# Altium PCB display.PCBDOC
Units mil, origin at the board's own origin, x right, y up, seen from the top; angles counter-clockwise.
Board outline 6600 x 4300 mil, 6 copper layers (Top Layer, Internal Plane 1, Mid-Layer 1, Mid-Layer 2, Internal Plane 2, Bottom Layer); 58 components, 74 nets, 528 pads, 252 vias.
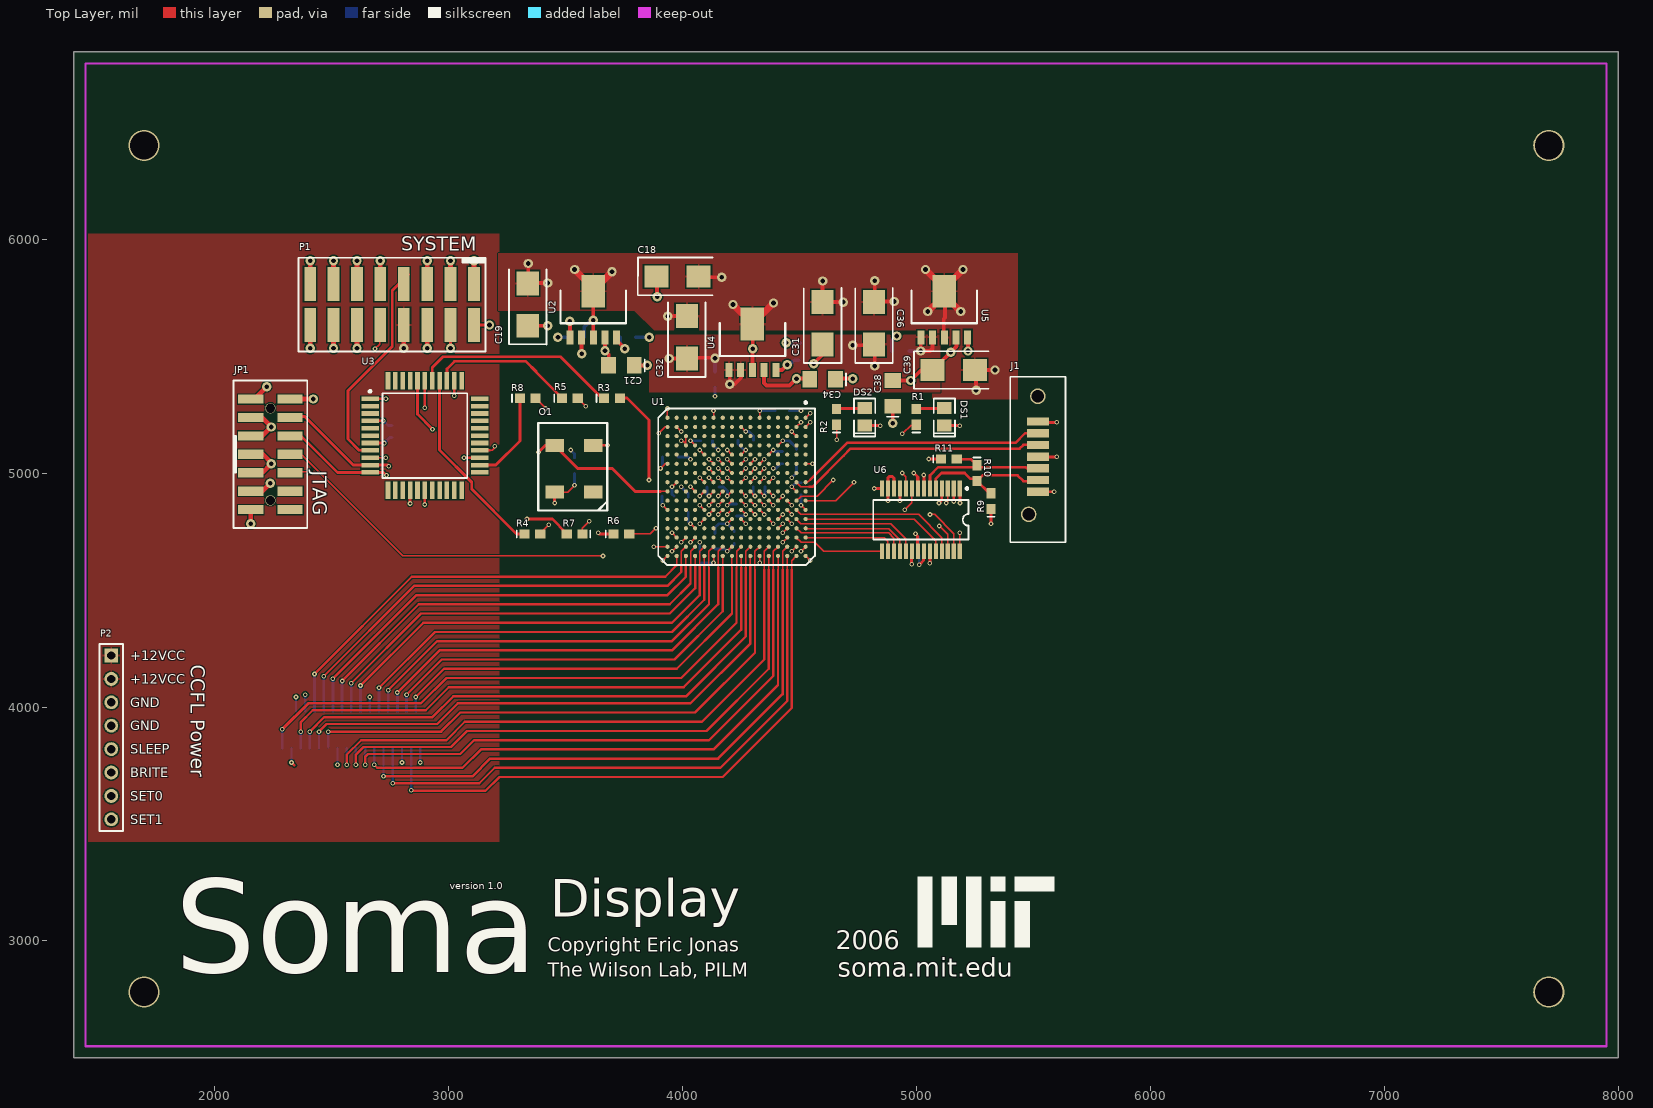
[diagram p0: Top Layer view]
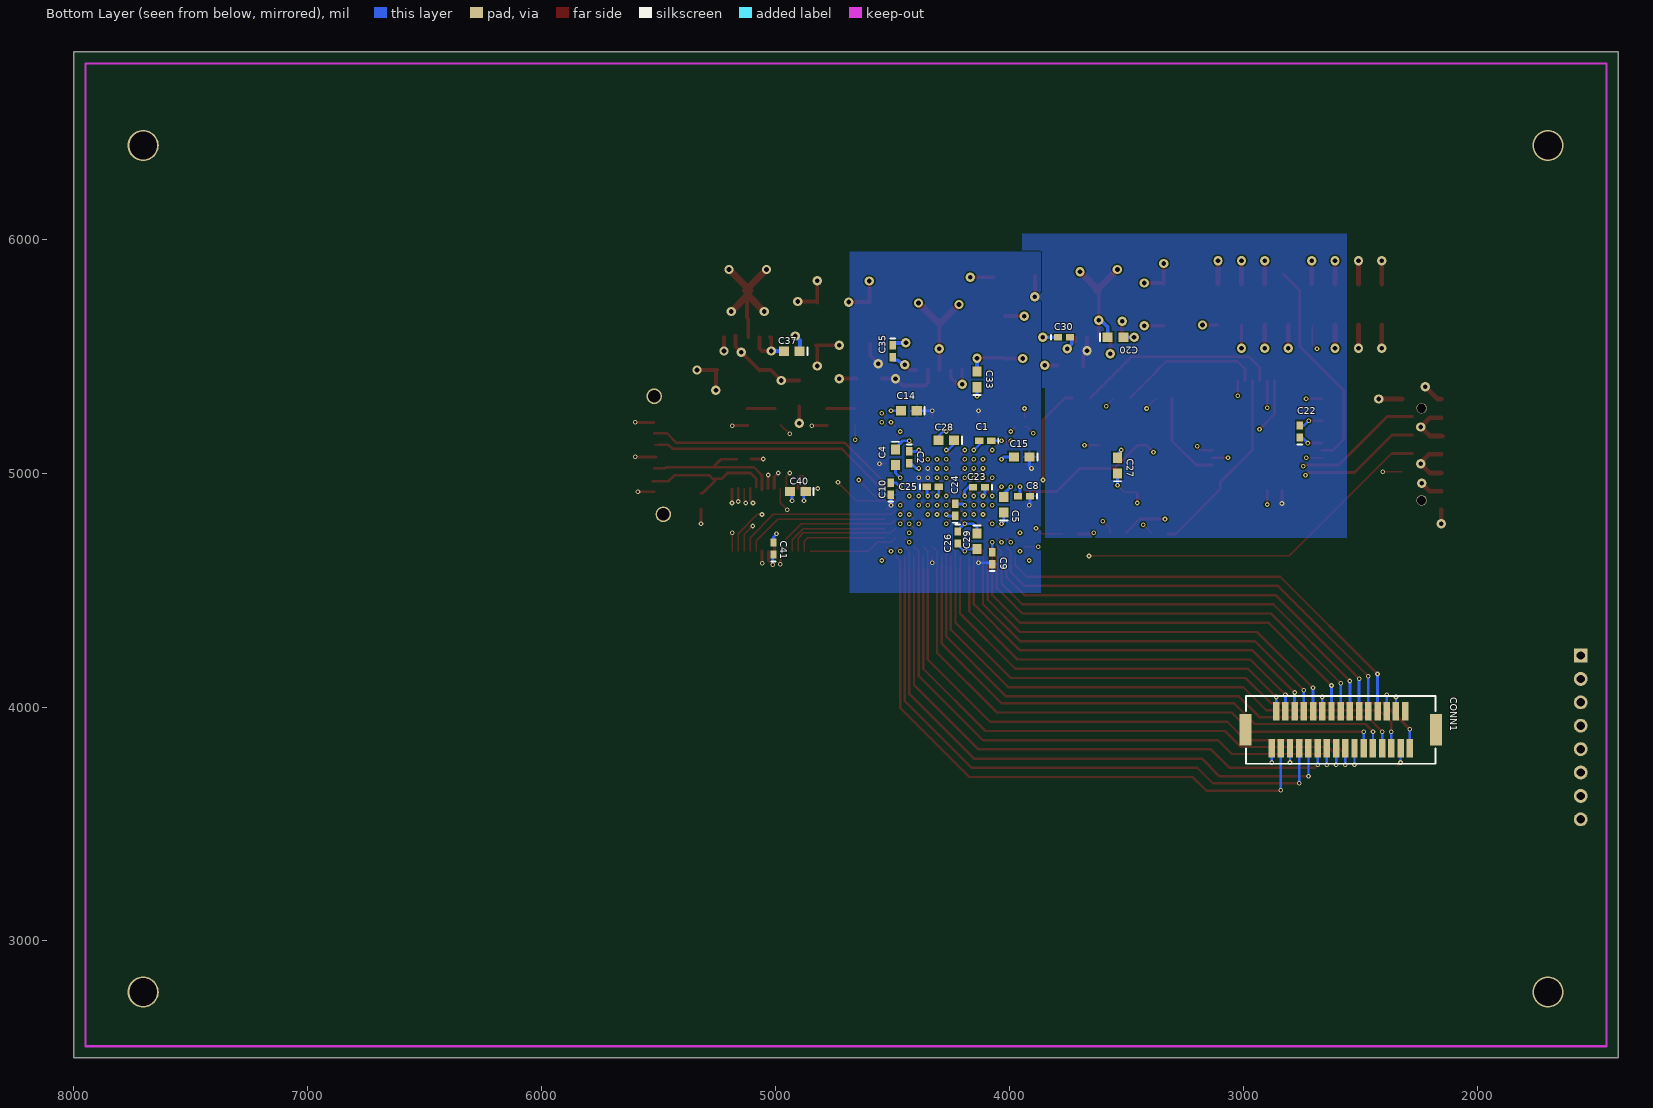
[diagram p1: Bottom Layer view, seen from below]
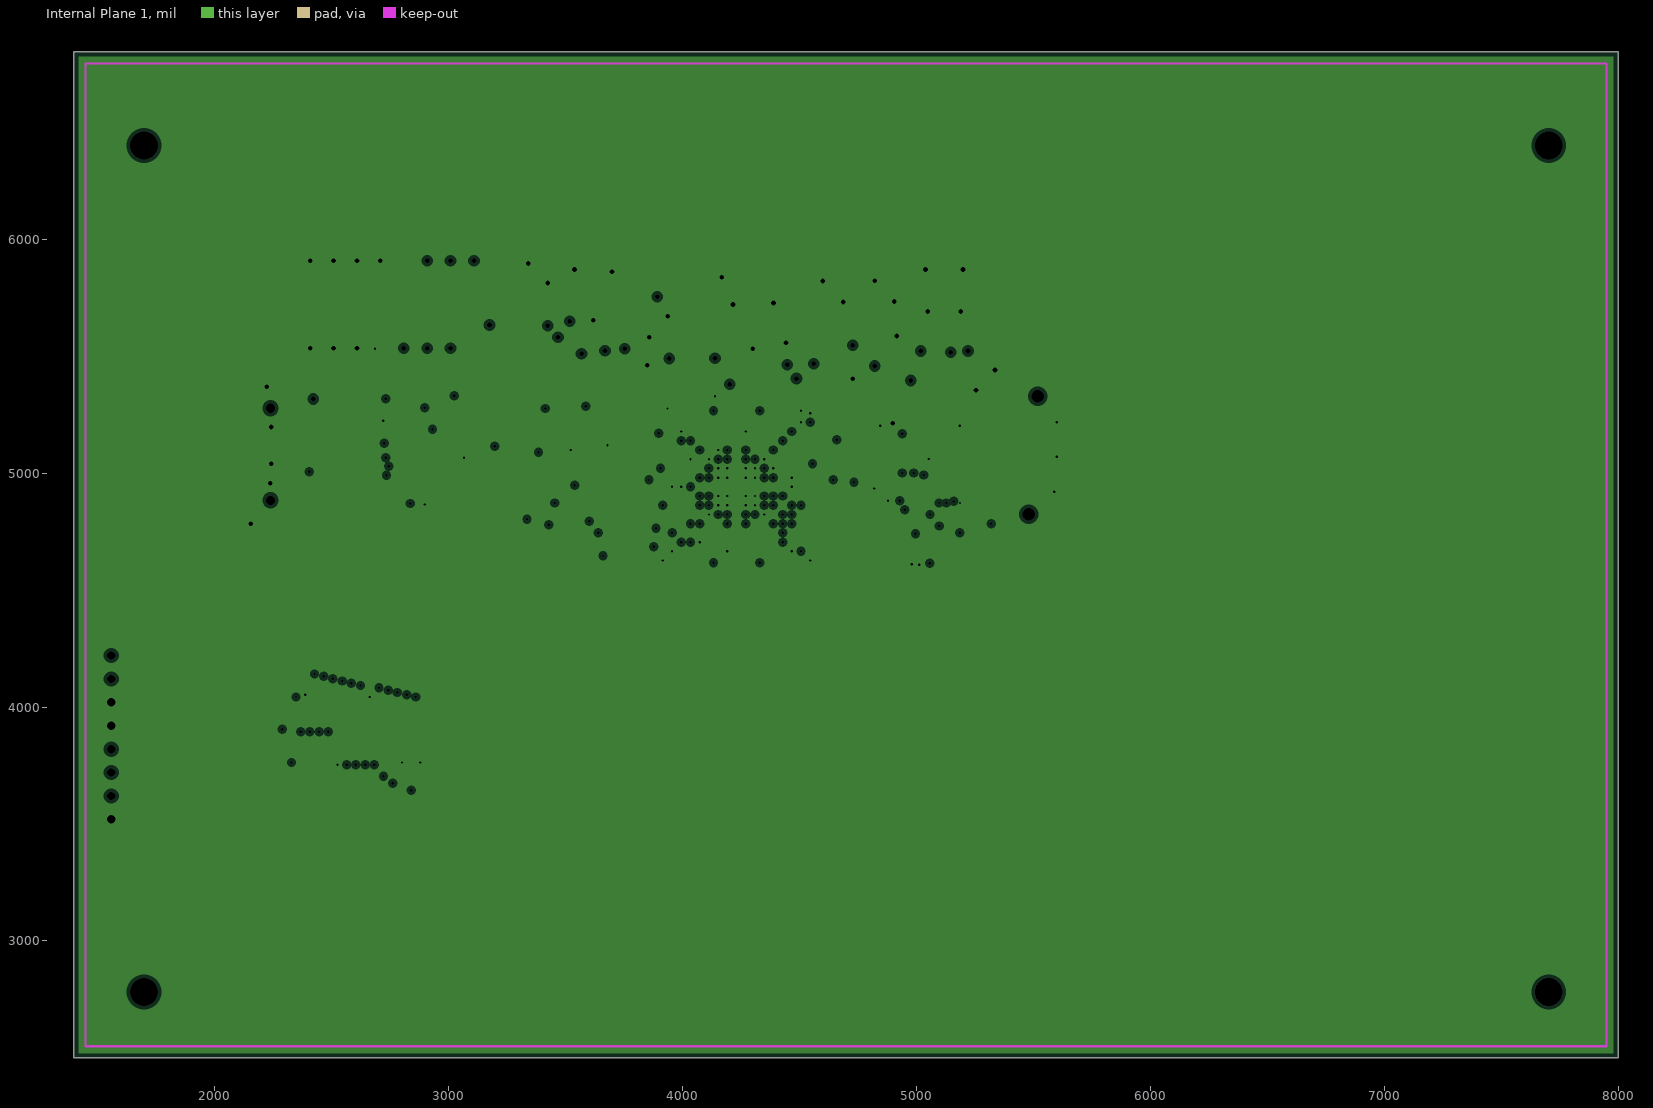
[diagram p2: Internal Plane 1, clearances drawn from the general rule]
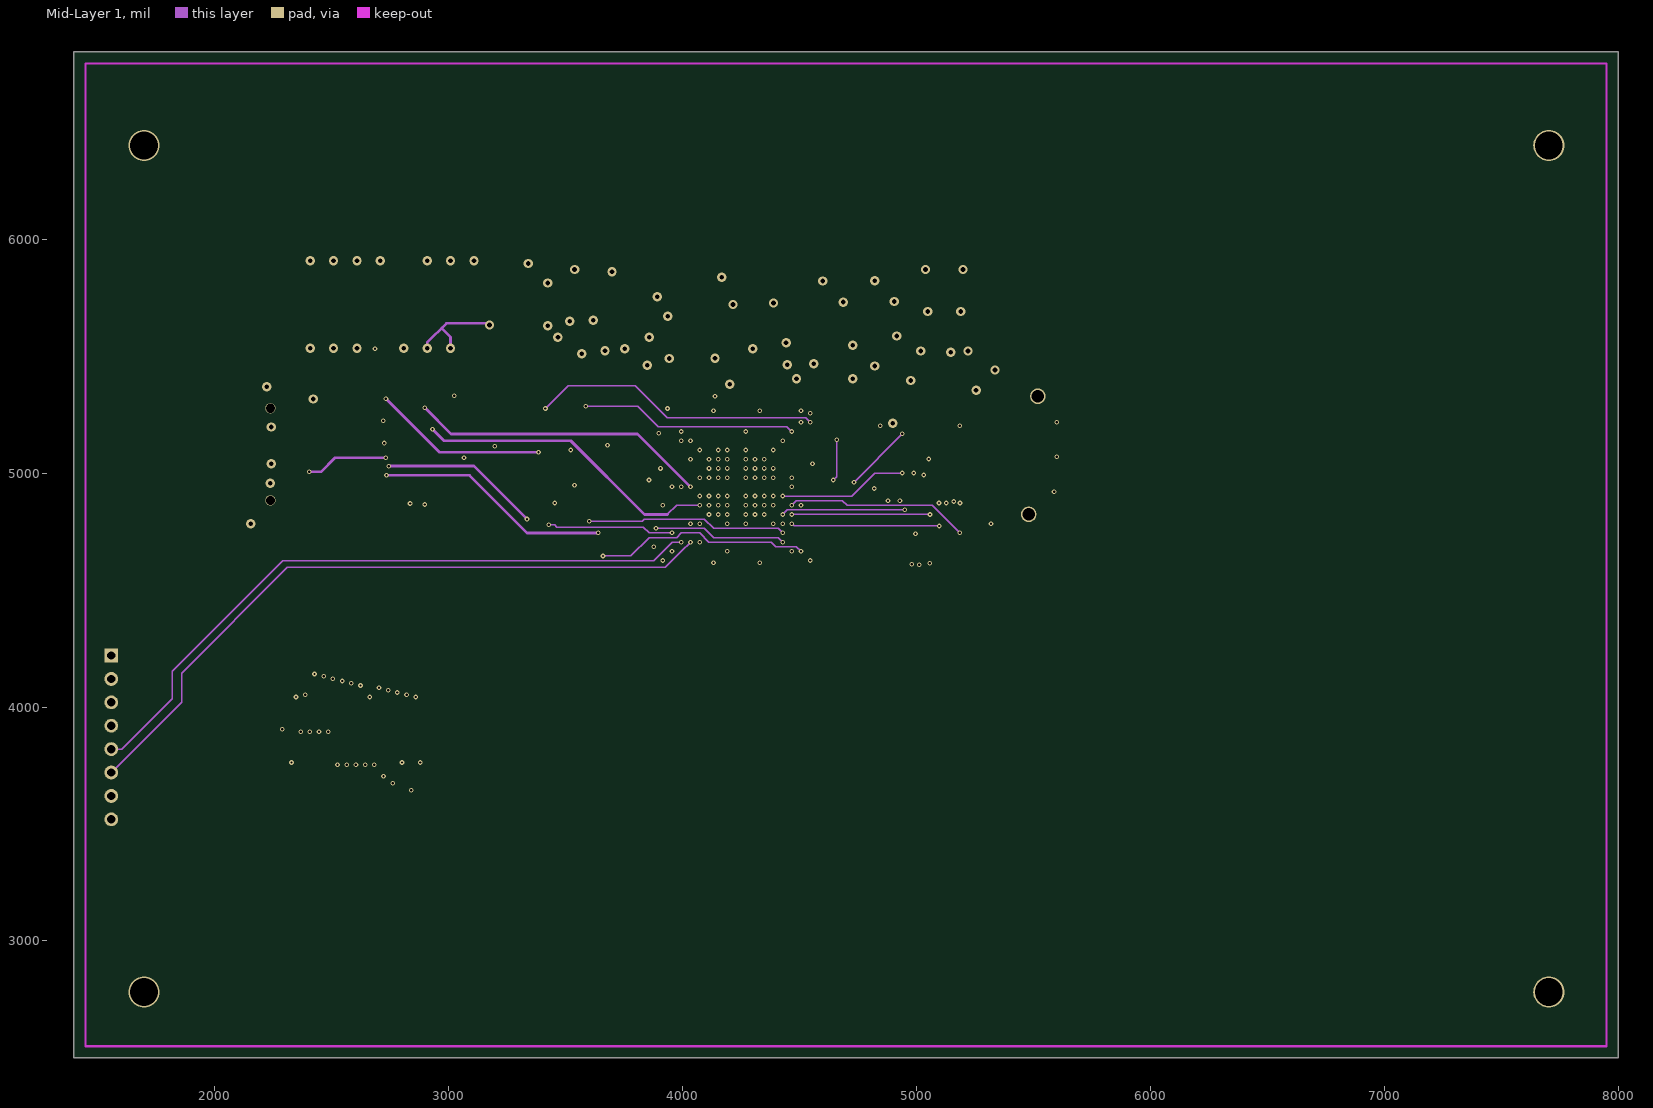
[diagram p3: Mid-Layer 1]
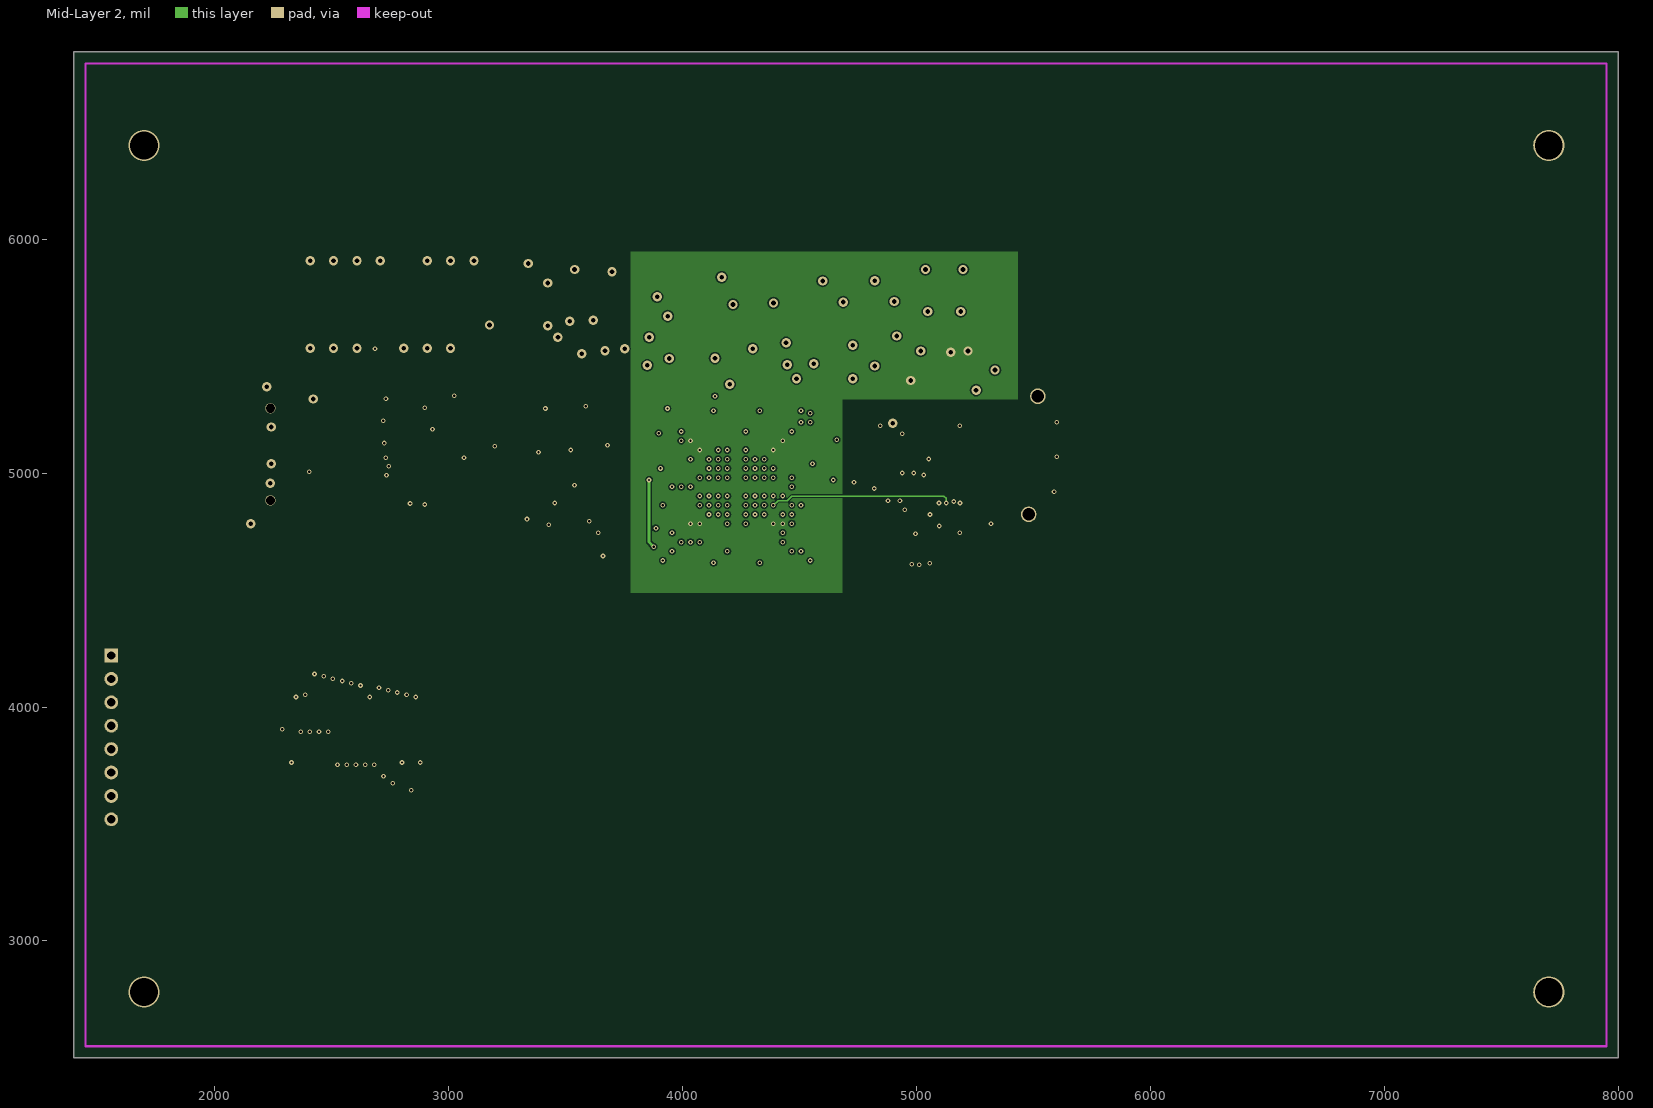
[diagram p4: Mid-Layer 2]
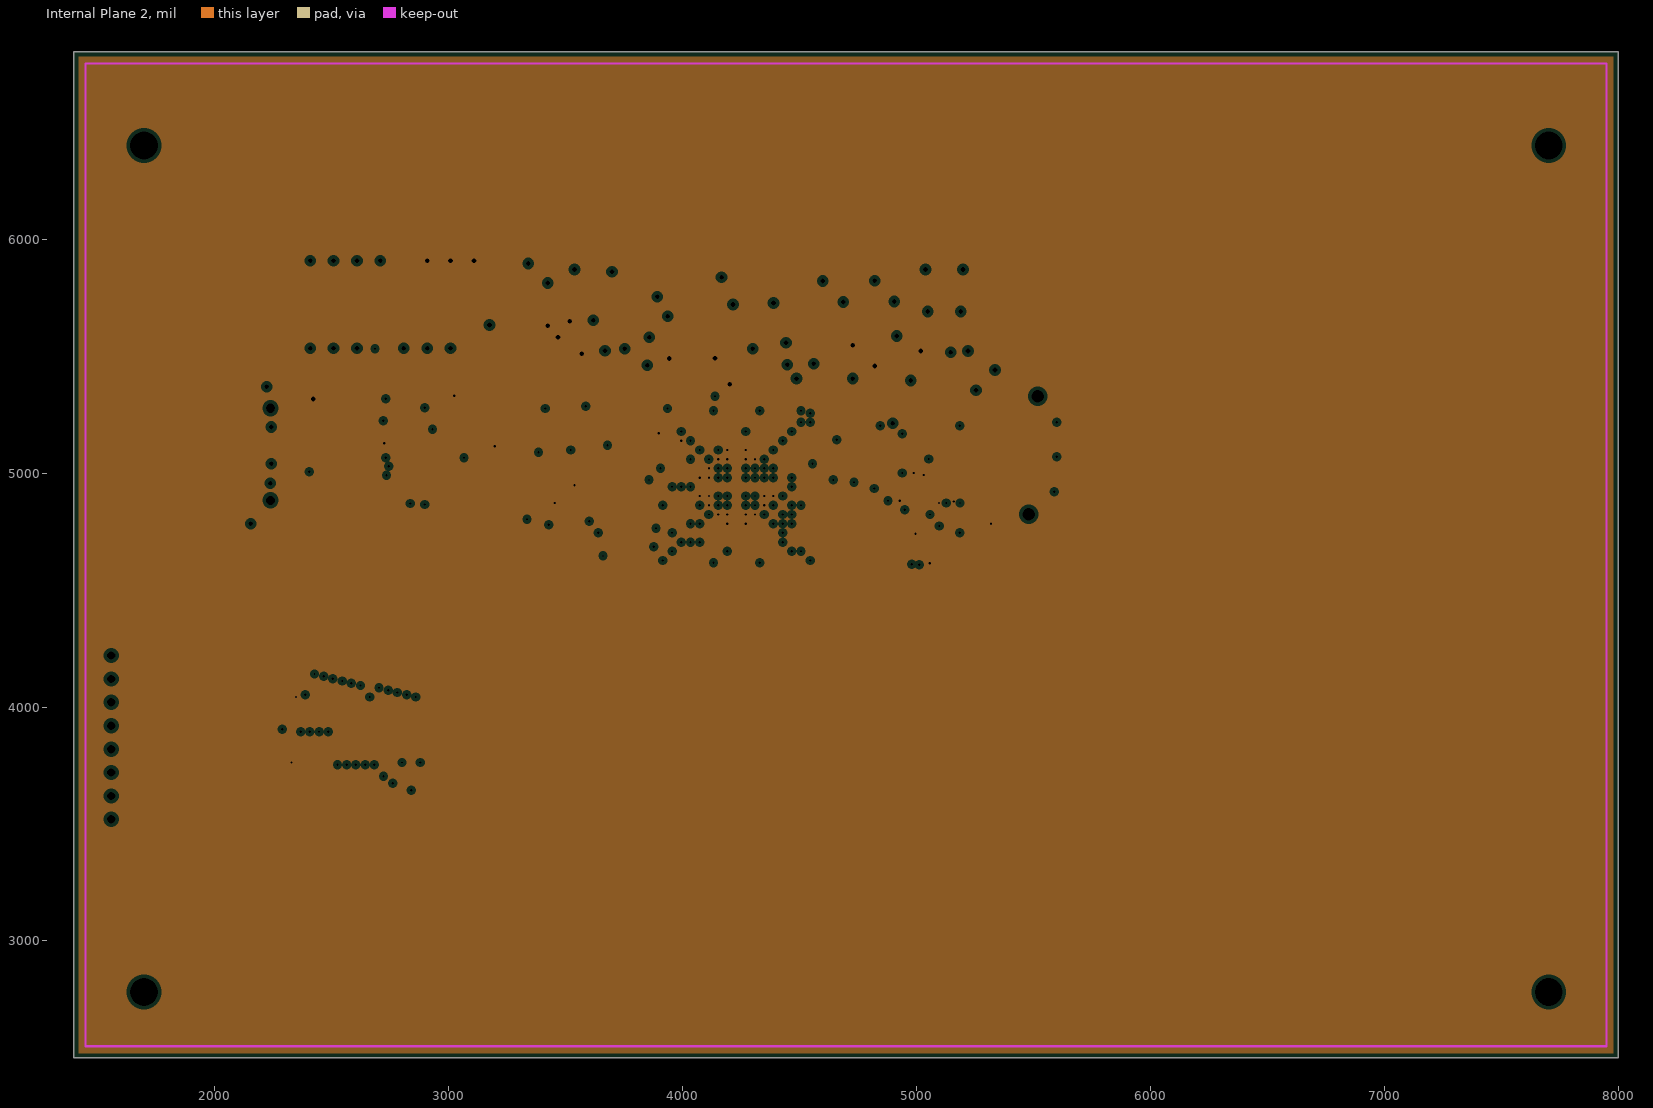
[diagram p5: Internal Plane 2, clearances drawn from the general rule]

## Layer stack, top to bottom
Top Layer: signal copper 1.4
Dielectric: core 12.6, FR-4, Dk 4.8
Internal Plane 1: plane copper 1.4, net GND
Dielectric: prepreg 12.6, FR-4, Dk 4.8
Mid-Layer 1: signal copper 1.4
Dielectric: core 12.6, FR-4, Dk 4.8
Mid-Layer 2: signal copper 1.4
Dielectric: prepreg 12.6, FR-4, Dk 4.8
Internal Plane 2: plane copper 1.4, net VCC
Dielectric: core 12.6, FR-4, Dk 4.8
Bottom Layer: signal copper 1.4

## Board outline
1400,2500 8000,2500 8000,6800 1400,6800

## Design rules (kind name [scope] priority, off if disabled: settings)
Clearance [All] p1: gap=6
ComponentClearance [All] p1: gap=10 collisioncheckmode=0 verticalgap=10
HoleSize [All] p1: absolutevalues=TRUE maxlimit=200 minlimit=1 maxpercent=80.000 minpercent=20.000
PlaneClearance [All] p1: clearance=15
PlaneConnect [All] p1: planeconnectstyle=Relief reliefexpansion=10 reliefentries=4 reliefconductorwidth=10 reliefairgap=7
PolygonConnect [All] p1: connectstyle=Relief reliefconductorwidth=10 reliefentries=4 polygonreliefangle="90 Angle"
RoomDefinition FPGA [InComponentClass('FPGA')] p1: confinementstyle=ConfineIn formatcopy=TRUE lockcomponents=FALSE outline 5999.06,3006.91 6314.03,3006.91 6314.03,3996.1 5999.06,3996.1
RoomDefinition SERIALIO [InComponentClass('SERIALIO')] p2: confinementstyle=ConfineIn formatcopy=TRUE lockcomponents=FALSE outline 6000,4015 7765,4015 7765,4850 6000,4850
RoomDefinition power [InComponentClass('power')] p3: confinementstyle=ConfineIn formatcopy=TRUE lockcomponents=FALSE outline 0,0 2000,0 2000,1000 0,1000
RoutingVias [All] p1: holewidth=20 width=20 viastyle="Through Hole" minholewidth=10 minwidth=20 maxholewidth=50 maxwidth=50
SolderMaskExpansion [All] p1: expansion=4
TestPointUsage [All] p1: valid=0 allowmultiple=FALSE
Testpoint [All] p1: side=15 testpointundercomponent=TRUE minsize=40 maxsize=100 preferedsize=60 minholesize=0 maxholesize=40 preferedholesize=32 testpointgrid=1 style=1023 order=0-112345678
Width [All] p1: maxlimit=50 minlimit=6 preferedwidth=8 toplayer_prefwidth=6 midlayer1_prefwidth=6 midlayer2_prefwidth=12 bottomlayer_prefwidth=12 minimp=50.000000 maximp=50.000000 favimp=50.000000
14 further rules are at their usual default settings.

## Classes and differential pairs
component class FPGA: CONN1 P2
component class SERIALIO: C40 C41 DS1 DS2 J1 R1 R2 R9 R10 R11 U6
component class power: C1 C2 C3 C4 C5 C6 C7 C8 C9 C10 C11 C12 C13 C14 C15 C16 C17 C18 C19 C20 C21 C22 C23 C24 C25 C26 C27 C28 C29 C30 C31 C32 C33 C34 C35 C36 C37 C38 C39 JP1 O1 P1 R3 R4 R5 R6 R7 R8 U1 U2 U3 U4 U5

## Components (designator, comment, footprint, x,y, rotation, side; value= is the part's Value field where it differs from the comment)
C1 "CAPACITOR" 0402 4104.33,5137.8 r0 bottom
C2 "CAPACITOR" 0402 4429.13,5066.99 r270 bottom
C4 "CAPACITOR" 0603 4488.19,5066.99 r270 bottom
C5 "CAPACITOR" 0603 4025.59,4864.11 r90 bottom
C8 "CAPACITOR" 0402 3938.91,4901.57 r0 bottom
C9 "CAPACITOR" 0402 4075,4636.05 r90 bottom
C10 "CAPACITOR" 0402 4507.87,4933.01 r90 bottom
C14 "CAPACITOR" 0603 4431.04,5265.75 r0 bottom
C15 "CAPACITOR" 0603 3948.76,5068.9 r0 bottom
C18 "POLCAP2" 6032 3980,5840 r0 top
C19 "POLCAP2" 6032 3340,5720 r90 top
C20 "CAPACITOR" 0603 3548.25,5580 r180 bottom
C21 "Cap" 1206 3740,5460 r180 top
C22 "CAPACITOR" 0402 2760,5177.34 r90 bottom
C23 "CAPACITOR" 0402 4131.75,4940 r0 bottom
C24 "CAPACITOR" 0402 4232.28,4842.52 r90 bottom
C25 "CAPACITOR" 0402 4328.8,4940.94 r180 bottom
C26 "CAPACITOR" 0402 4222.44,4724.41 r270 bottom
C27 "CAPACITOR" 0603 3540,5031.75 r90 bottom
C28 "CAPACITOR" 0603 4271.75,5140 r0 bottom
C29 "CAPACITOR" 0603 4140,4708.25 r270 bottom
C30 "CAPACITOR" 0402 3768.25,5580 r180 bottom
C31 "POLCAP2" 6032 4600,5640 r90 top
C32 "POLCAP2" 6032 4020,5580 r90 top
C33 "CAPACITOR" 0603 4140,5400 r90 bottom
C34 "Cap" 1206 4600,5400 r180 top
C35 "CAPACITOR" 0402 4500,5520 r270 bottom
C36 "POLCAP2" 6032 4820,5640 r90 top
C37 "CAPACITOR" 0603 4931.75,5520 r0 bottom
C38 "Cap" 1206 4900,5340 r90 top
C39 "POLCAP2" 6032 5160,5440 r0 top
C40 "CAPACITOR" 0603 4905.75,4921.5 r0 bottom
C41 "CAPACITOR" 0402 5009.84,4677.1 r90 bottom
CONN1 "31-pin connector" DF9A-31S-1V 2585.83,3902.76 r180 bottom locked
DS1 "LED3" "SMD _LED" 5120,5240 r90 top
DS2 "LED3" "SMD _LED" 4780,5240 r90 top
J1 "SATA 7-pin header" "MOLES 67800-5005" 5520,4920 r270 top
JP1 "Header 7X2" "SMT 2x7 2mm HDR" 2240,5080 r90 top
O1 "OSC2" ECS-3953M 3620.32,4918.43 r90 top
P1 "Header 8X2" "MOLEX 15-91-2160" 2760,5720 r0 top
P2 "LX9501" HDR1X8 1560,4220 r270 top
R1 "current-limiting series res" 0603 5000,5240 r90 top
R2 "current-limiting series res" 0603 4660,5240 r90 top
R3 "current-limiting series res" CC1608-0603 3700,5320 r0 top
R4 "current-limiting series res" CC1608-0603 3360,4740 r0 top
R5 "current-limiting series res" CC1608-0603 3520,5320 r0 top
R6 "current-limiting series res" CC1608-0603 3740,4740 r0 top
R7 "current-limiting series res" CC1608-0603 3540,4740 r180 top
R8 "current-limiting series res" CC1608-0603 3340,5320 r0 top
R9 "100" 0603 5320,4880 r90 top
R10 "100" 0603 5260,5000 r270 top
R11 "100" 0603 5140,5060 r0 top
U1 "Xilinx XC3S200-FT256" "Xilinx FT256 BGA" 4232.28,4940.94 r270 top locked
U2 "TPS79518" SOT223-5/Simple 3620,5580 r0 top
U3 "Xilinx CoolRunner-II XC2C64A" QFP10x10-G44/G10N 2900,5160 r0 top
U4 "TPS79525" SOT223-5/Simple 4300,5440 r0 top
U5 "TPS79501" SOT223-5/Simple 5120,5580 r0 top
U6 "DS92LV1224" SSO-G28/E4.3 5020,4800 r180 top

## Footprints (in the part's own frame and the unit in brackets; to place one, negate y for a bottom-side part, rotate by r counter-clockwise, add the part's x,y. Pads: shape width x height; smd on the part's side, far side on the other; paste and mask are expansions set on the pad)
0402 [mm] "Standard-sized 0402 Passive"
  rect 0.9x0.7 smd: 1(-0.65,0) 2(0.65,0)
  silkscreen extent -1.4,-0.25 -1.4,0.25
0603 [mm] "Standard-sized 0603 Passive"
  rect 1.1x1 smd: 1(-0.85,0) 2(0.85,0)
  silkscreen extent -1.7,-0.4 -1.7,0.4
1206 [mm] "Standard-sized 1206 Passive"
  rect 1.6x1.8 smd: 1(-1.4,0) 2(1.4,0)
  silkscreen extent -2.53,-0.65 -2.53,0.65
6032 [mm] "Standard-Sized 7343 Polarized Leadless Cap"
  rect 2.6x2.4 smd: 1(-2.3,0) 2(2.3,0)
  silkscreen extent -4.32,-2.03 3.81,2.05
CC1608-0603 [mm] "Chip Capacitor; Body 1.6 x 0.8 mm (LxW typ)"
  rect 1.1x1 smd: 1(-0.85,0) 2(0.85,0)
  silkscreen extent -1.7,-0.4 -1.7,0.4
DF9A-31S-1V [mm] "Hirose 31-pin receptacle"
  rect 1.3x3.4 smd: 0(-10.35,0) 0(10.35,0)
  rect 0.7x2 smd: 1(-7.5,-2) 2(-7,2) 3(-6.5,-2) 4(-6,2) 5(-5.5,-2) 6(-5,2) 7(-4.5,-2) 8(-4,2) 9(-3.5,-2) 10(-3,2) 11(-2.5,-2) 12(-2,2) 13(-1.5,-2) 14(-1,2) 15(-0.5,-2) 16(0,2) 17(0.5,-2) 18(1,2) 19(1.5,-2) 20(2,2) 21(2.5,-2) 22(3,2) 23(3.5,-2) 24(4,2) 25(4.5,-2) 26(5,2) 27(5.5,-2) 28(6,2) 29(6.5,-2) 30(7,2) 31(7.5,-2)
  silkscreen extent -10.29,-3.68 10.29,3.68
ECS-3953M [mm] "ECS SMD CLOCK OSCILLATOR"
  rect 1.4x2 smd: 1(0,0) 2(5.08,0) 3(5.08,4.2) 4(0,4.2)
  silkscreen extent -2,-1.5 7.5,6
HDR1X8 [mm] "Connector; Header; 8 Position"
  rect 1.5x1.5 hole 0.9: 1(0,0)
  round 1.5 hole 0.9: 2(2.54,0) 3(5.08,0) 4(7.62,0) 5(10.16,0) 6(12.7,0) 7(15.24,0) 8(17.78,0)
  silkscreen extent -1.27,-1.27 19.05,1.27
"MOLES 67800-5005" [mm] "SATA vertical PCB HEADER SMT"
  round 1.7 hole 1.35: 0(-10.37,0) 0(2.46,-1)
  rect 0.9x2.4 smd: 1(0,0) 2(-1.27,0) 3(-2.54,0) 4(-3.81,0) 5(-5.08,0) 6(-6.35,0) 7(-7.62,0)
  silkscreen extent -12.5,-3 5.5,3
"MOLEX 15-91-2160" [mm] "SMT 100-mil pitch 16 -pin dual-row header"
  rect 1.27x3.68 smd: 1(8.89,2.22) 2(8.89,-2.22) 3(6.35,2.22) 4(6.35,-2.22) 5(3.81,2.22) 6(3.81,-2.22) 7(1.27,2.22) 8(1.27,-2.22) 9(-1.27,2.22) 10(-1.27,-2.22) 11(-3.81,2.22) 12(-3.81,-2.22) 13(-6.35,2.22) 14(-6.35,-2.22) 15(-8.89,2.22) 16(-8.89,-2.22)
  silkscreen extent -10.16,-5.08 10.16,5.08
QFP10x10-G44/G10N [mm] "QFP; 44 Leads; Body 10 x 10 mm; Pitch 0.8 mm"
  rect 1.9x0.5 smd: 1(-5.95,4) 2(-5.95,3.2) 3(-5.95,2.4) 4(-5.95,1.6) 5(-5.95,0.8) 6(-5.95,0) 7(-5.95,-0.8) 8(-5.95,-1.6) 9(-5.95,-2.4) 10(-5.95,-3.2) 11(-5.95,-4) 23(5.95,-4) 24(5.95,-3.2) 25(5.95,-2.4) 26(5.95,-1.6) 27(5.95,-0.8) 28(5.95,0) 29(5.95,0.8) 30(5.95,1.6) 31(5.95,2.4) 32(5.95,3.2) 33(5.95,4)
  rect 0.5x1.9 smd: 12(-4,-5.95) 13(-3.2,-5.95) 14(-2.4,-5.95) 15(-1.6,-5.95) 16(-0.8,-5.95) 17(0,-5.95) 18(0.8,-5.95) 19(1.6,-5.95) 20(2.4,-5.95) 21(3.2,-5.95) 22(4,-5.95) 34(4,5.95) 35(3.2,5.95) 36(2.4,5.95) 37(1.6,5.95) 38(0.8,5.95) 39(0,5.95) 40(-0.8,5.95) 41(-1.6,5.95) 42(-2.4,5.95) 43(-3.2,5.95) 44(-4,5.95)
  silkscreen extent -6.07,-4.6 4.6,4.92
"SMD _LED" [mm] "SMT LED; 2 Leads"
  rect 1.3x1.6 smd: 1(0.95,0) 2(-0.95,0)
  silkscreen extent -2.13,-1.15 2,1.15
"SMT 2x7 2mm HDR" [mm] "SMT dual-row 14-pin SMT header with posts, like Molex 87832-1420"
  round 1.1 hole 1: 0(-5,0) 0(5,0)
  rect 1x2.75 smd: 1(6,2.125) 2(6,-2.125) 3(4,2.125) 4(4,-2.125) 5(2,2.125) 6(2,-2.125) 7(0,2.125) 8(0,-2.125) 9(-2,2.125) 10(-2,-2.125) 11(-4,2.125) 12(-4,-2.125) 13(-6,2.125) 14(-6,-2.125)
  silkscreen extent -8,-4 8,4
SOT223-5/Simple [mil] "SOT-223 without large heatsink"
  rect 30x60 smd: 1(-100,0) 2(-50,0) 3(0,0) 4(50,0) 5(100,0)
  rect 100x140 smd: 3(0,196.85)
  silkscreen extent -140,60 140,200
SSO-G28/E4.3 [mm] "SSOP; 28 Leads; Body Width 5.3 mm; Pitch 0.65 mm"
  rect 0.45x1.7 smd: 1(-4.225,-3.4) 2(-3.575,-3.4) 3(-2.925,-3.4) 4(-2.275,-3.4) 5(-1.625,-3.4) 6(-0.975,-3.4) 7(-0.325,-3.4) 8(0.325,-3.4) 9(0.975,-3.4) 10(1.625,-3.4) 11(2.275,-3.4) 12(2.925,-3.4) 13(3.575,-3.4) 14(4.225,-3.4) 15(4.225,3.4) 16(3.575,3.4) 17(2.925,3.4) 18(2.275,3.4) 19(1.625,3.4) 20(0.975,3.4) 21(0.325,3.4) 22(-0.325,3.4) 23(-0.975,3.4) 24(-1.625,3.4) 25(-2.275,3.4) 26(-2.925,3.4) 27(-3.575,3.4) 28(-4.225,3.4)
  silkscreen extent -5.18,-3.52 5.18,2.15
"Xilinx FT256 BGA" [mm] "Xilinx BGA"
  round 0.45 smd mask+0.05: A1(-7.5,7.5) A2(-6.5,7.5) A3(-5.5,7.5) A4(-4.5,7.5) A5(-3.5,7.5) A6(-2.5,7.5) A7(-1.5,7.5) A8(-0.5,7.5) A9(0.5,7.5) A10(1.5,7.5) A11(2.5,7.5) A12(3.5,7.5) A13(4.5,7.5) A14(5.5,7.5) A15(6.5,7.5) A16(7.5,7.5) B1(-7.5,6.5) B2(-6.5,6.5) B3(-5.5,6.5) B4(-4.5,6.5) B5(-3.5,6.5) B6(-2.5,6.5) B7(-1.5,6.5) B8(-0.5,6.5) B9(0.5,6.5) B10(1.5,6.5) B11(2.5,6.5) B12(3.5,6.5) B13(4.5,6.5) B14(5.5,6.5) B15(6.5,6.5) B16(7.5,6.5) C1(-7.5,5.5) C2(-6.5,5.5) C3(-5.5,5.5) C4(-4.5,5.5) C5(-3.5,5.5) C6(-2.5,5.5) C7(-1.5,5.5) C8(-0.5,5.5) C9(0.5,5.5) C10(1.5,5.5) C11(2.5,5.5) C12(3.5,5.5) C13(4.5,5.5) C14(5.5,5.5) C15(6.5,5.5) C16(7.5,5.5) D1(-7.5,4.5) D2(-6.5,4.5) D3(-5.5,4.5) D4(-4.5,4.5) D5(-3.5,4.5) D6(-2.5,4.5) D7(-1.5,4.5) D8(-0.5,4.5) D9(0.5,4.5) D10(1.5,4.5) D11(2.5,4.5) D12(3.5,4.5) D13(4.5,4.5) D14(5.5,4.5) D15(6.5,4.5) D16(7.5,4.5) E1(-7.5,3.5) E2(-6.5,3.5) E3(-5.5,3.5) E4(-4.5,3.5) E5(-3.5,3.5) E6(-2.5,3.5) E7(-1.5,3.5) E8(-0.5,3.5) E9(0.5,3.5) E10(1.5,3.5) E11(2.5,3.5) E12(3.5,3.5) E13(4.5,3.5) E14(5.5,3.5) E15(6.5,3.5) E16(7.5,3.5) F1(-7.5,2.5) F2(-6.5,2.5) F3(-5.5,2.5) F4(-4.5,2.5) F5(-3.5,2.5) F6(-2.5,2.5) F7(-1.5,2.5) F8(-0.5,2.5) F9(0.5,2.5) F10(1.5,2.5) F11(2.5,2.5) F12(3.5,2.5) F13(4.5,2.5) F14(5.5,2.5) F15(6.5,2.5) F16(7.5,2.5) G1(-7.5,1.5) G2(-6.5,1.5) G3(-5.5,1.5) G4(-4.5,1.5) G5(-3.5,1.5) G6(-2.5,1.5) G7(-1.5,1.5) G8(-0.5,1.5) G9(0.5,1.5) G10(1.5,1.5) G11(2.5,1.5) G12(3.5,1.5) G13(4.5,1.5) G14(5.5,1.5) G15(6.5,1.5) G16(7.5,1.5) H1(-7.5,0.5) H2(-6.5,0.5) H3(-5.5,0.5) H4(-4.5,0.5) H5(-3.5,0.5) H6(-2.5,0.5) H7(-1.5,0.5) H8(-0.5,0.5) H9(0.5,0.5) H10(1.5,0.5) H11(2.5,0.5) H12(3.5,0.5) H13(4.5,0.5) H14(5.5,0.5) H15(6.5,0.5) H16(7.5,0.5) J1(-7.5,-0.5) J2(-6.5,-0.5) J3(-5.5,-0.5) J4(-4.5,-0.5) J5(-3.5,-0.5) J6(-2.5,-0.5) J7(-1.5,-0.5) J8(-0.5,-0.5) J9(0.5,-0.5) J10(1.5,-0.5) J11(2.5,-0.5) J12(3.5,-0.5) J13(4.5,-0.5) J14(5.5,-0.5) J15(6.5,-0.5) J16(7.5,-0.5) K1(-7.5,-1.5) K2(-6.5,-1.5) K3(-5.5,-1.5) K4(-4.5,-1.5) K5(-3.5,-1.5) K6(-2.5,-1.5) K7(-1.5,-1.5) K8(-0.5,-1.5) K9(0.5,-1.5) K10(1.5,-1.5) K11(2.5,-1.5) K12(3.5,-1.5) K13(4.5,-1.5) K14(5.5,-1.5) K15(6.5,-1.5) K16(7.5,-1.5) L1(-7.5,-2.5) L2(-6.5,-2.5) L3(-5.5,-2.5) L4(-4.5,-2.5) L5(-3.5,-2.5) L6(-2.5,-2.5) L7(-1.5,-2.5) L8(-0.5,-2.5) L9(0.5,-2.5) L10(1.5,-2.5) L11(2.5,-2.5) L12(3.5,-2.5) L13(4.5,-2.5) L14(5.5,-2.5) L15(6.5,-2.5) L16(7.5,-2.5) M1(-7.5,-3.5) M2(-6.5,-3.5) M3(-5.5,-3.5) M4(-4.5,-3.5) M5(-3.5,-3.5) M6(-2.5,-3.5) M7(-1.5,-3.5) M8(-0.5,-3.5) M9(0.5,-3.5) M10(1.5,-3.5) M11(2.5,-3.5) M12(3.5,-3.5) M13(4.5,-3.5) M14(5.5,-3.5) M15(6.5,-3.5) M16(7.5,-3.5) N1(-7.5,-4.5) N2(-6.5,-4.5) N3(-5.5,-4.5) N4(-4.5,-4.5) N5(-3.5,-4.5) N6(-2.5,-4.5) N7(-1.5,-4.5) N8(-0.5,-4.5) N9(0.5,-4.5) N10(1.5,-4.5) N11(2.5,-4.5) N12(3.5,-4.5) N13(4.5,-4.5) N14(5.5,-4.5) N15(6.5,-4.5) N16(7.5,-4.5) P1(-7.5,-5.5) P2(-6.5,-5.5) P3(-5.5,-5.5) P4(-4.5,-5.5) P5(-3.5,-5.5) P6(-2.5,-5.5) P7(-1.5,-5.5) P8(-0.5,-5.5) P9(0.5,-5.5) P10(1.5,-5.5) P11(2.5,-5.5) P12(3.5,-5.5) P13(4.5,-5.5) P14(5.5,-5.5) P15(6.5,-5.5) P16(7.5,-5.5) R1(-7.5,-6.5) R2(-6.5,-6.5) R3(-5.5,-6.5) R4(-4.5,-6.5) R5(-3.5,-6.5) R6(-2.5,-6.5) R7(-1.5,-6.5) R8(-0.5,-6.5) R9(0.5,-6.5) R10(1.5,-6.5) R11(2.5,-6.5) R12(3.5,-6.5) R13(4.5,-6.5) R14(5.5,-6.5) R15(6.5,-6.5) R16(7.5,-6.5) T1(-7.5,-7.5) T2(-6.5,-7.5) T3(-5.5,-7.5) T4(-4.5,-7.5) T5(-3.5,-7.5) T6(-2.5,-7.5) T7(-1.5,-7.5) T8(-0.5,-7.5) T9(0.5,-7.5) T10(1.5,-7.5) T11(2.5,-7.5) T12(3.5,-7.5) T13(4.5,-7.5) T14(5.5,-7.5) T15(6.5,-7.5) T16(7.5,-7.5)
  silkscreen extent -9.27,-8.5 8.5,8.5

## Part data
C1 C2 C4 C5 C8 C9 C10 C14 C15 C18 C19 C22 C23 C24 C25 C26 C27 C28 C29 C31 C32 C36 C39 C40 C41: "Standard Capacitor"
C20 C30 C33 C35 C37: library part Cap, "Capacitor"
C21 C34 C38: "Capacitor"
CONN1: library part CON31
DS1 DS2: "Typical BLUE SiC LED"
J1: library part SATA-7
JP1: "Header, 7-Pin, Dual row"
O1: "ECS SMD Oscillator, ECS-3953M"
P1: "Header, 8-Pin, Dual row"
P2: library part "Header 8", "Header, 8-Pin"
R1 R2 R3 R4 R5 R6 R7 R8: library part Res1, "Resistor"
R9 R10 R11: library part RESISTOR, "Standard Passive Resistor"
U1: library part XC3S200-FT256, "Xilinx Spartan-3 FPGA"
U2 U4 U5: library part TPS795XX, "TI Ultra-low-noise LDO"
U3: library part XC2C64A-5VQ44C
U6: "30-66 MHz 10-Bit Bus LVDS Deserializer"

## Free pads (board coordinates)
  round 133.86 hole 118.11: 0(1700,2781.89) 0(1700,6400) 0(7703.94,2781.89) 0(7703.94,6400)

## Via types
v1: diameter 20, hole 10, Top Layer to Bottom Layer, tented top, 100 vias
v2: diameter 20, hole 10, Top Layer to Bottom Layer, 87 vias
v3: diameter 40, hole 20, Top Layer to Bottom Layer, 65 vias

## Nets (pads, with @x,y where several pads share a name; then routed paths per layer and width w, separated by ;. In a path a pad name is that pad's centre, name@x,y a point inside that pad or via, vN(x,y) a via of type N, cw(c..) or ccw(c..) an arc to the next point about the centre after c; other vN are vias at no path point)
+1.2VCC: C1.1 C2.1 C4.1 C5.1 C38.2 C39.1 U1.D4 U1.D13 U1.E5 U1.E12 U1.M5 U1.M12 U1.N4 U1.N13 U5.4 U5.5 | length 874.9
  Top Layer w6: v1(4035.43,4783.46) U1.N13 ; v1(4035.43,5137.8) U1.N4 ; v1(4074.8,4783.46) U1.M12 ; v1(4074.8,5098.43) U1.M5 ; U1.E12 v1(4389.76,4783.46) ; U1.E5 v1(4389.76,5098.43) ; U1.D13 v1(4429.13,4783.46) ; U1.D4 v1(4429.13,5137.8)
  Top Layer w16: C38.2 v3(4976.81,5395.12) 5021.69,5440 C39.1 ; C39.1@5068.9,5437.99 5172.24,5541.34 U5.4@5172.24,5585.63 ; v3(5221.46,5521.65) U5.5@5221.46,5580.71
  Bottom Layer w12: C5.1 4025.59,4793.31 v1(4035.43,4783.46) ; v1(4035.43,5137.8) C1.1 ; v1(4389.76,5098.43) 4395.61,5092.58 C2.1 ; v1(4429.13,5137.8) 4457.35,5137.8 4488.19,5106.96 C4.1
  other v3: 5147.64,5516.73
+1.8VCC: C18.1 C21.2 U2.4 U3.15 | length 278.5
  Top Layer w12: v2(2837.01,4869.68) U3.15
  Top Layer w16: U2.4 v3(3670,5522.91) 3686.02,5506.89 C21.2@3686.02,5452.76 ; v3(3892.72,5752.95) C18.1@3892.72,5841.54
+2.5VCC: C8.1 C9.1 C10.1 C14.1 C15.1 C31.1 C34.2 U1.A6 U1.A11 U1.E8 U1.F1 U1.F7 U1.F8 U1.F16 U1.L1 U1.L16 U1.T6 U1.T11 U4.4 | length 945
  Top Layer w6: v1(3907.48,5019.69) 3927.17,5039.37 U1.T6 ; v1(3917.32,4862.2) U1.T11 ; v1(4133.86,4616.14) U1.L16 ; U1.L1 v1(4133.86,5265.75) ; v1(4330.71,4616.14) U1.F16 ; U1.F8 v1(4350.39,4980.31) ; U1.F7 v1(4350.39,5019.69) ; U1.F1 v1(4330.71,5265.75) ; U1.E8 v1(4389.76,4980.31) ; v1(4507.87,4862.2) U1.A11 ; U1.A6 v1(4557.09,5039.37)
  Top Layer w16: U4.4 4350,5384.25 4360.24,5374.02 4458.66,5374.02 v3(4488.19,5403.54) C34.2@4547.24,5403.54 ; v3(4562.01,5467.52) 4596.46,5501.97 C31.1@4596.46,5551.18
  Bottom Layer w12: v1@3913.32,4866.2 C8.1 ; 3915.29,5027.5 C15.1 ; C9.1@4080.68,4616.14 v1(4133.86,4616.14) 4122.83,4616.14 ; v1(4330.71,5265.75) C14.1 ; v1(4507.87,4862.2) C10.1
+5VCC: P1.2 P1.4 P1.6 | length 695.1
  Top Layer w12: v3(3010,5533.31) P1.4 ; P1.2 v3(3176.46,5632.6)
  Top Layer w20: v3(2910,5533.07) P1.6
  Mid-Layer 1 w12: v3(2910,5533.07) 2910,5557.64 2992.13,5639.76 v3@3179.13,5639.76 ; 2971.98,5619.61 3010,5581.59 v3(3010,5533.31)
+12VCC: P1.8 P2.1 P2.2 | length 99.5
  Top Layer w20: v3(2810,5533.07) P1.8
B0: CONN1.20 U1.P16 | length 1917.5
  Top Layer w6: 4015.75,4606.3 U1.P16
  Top Layer w10: v2(2507.09,4121.26) 2864.17,4478.35 3937.01,4478.35 4015.75,4557.09 4015.75,4606.3
  Bottom Layer w12: CONN1.20 v2(2507.09,4121.26)
B1: CONN1.21 U1.F15 | length 2495.2
  Top Layer w6: 4311.02,4586.61 4311.02,4665.35 U1.F15
  Top Layer w10: v2(2487.4,3894.89) 2969.69,3894.89 3051.18,3976.38 4055.12,3976.38 4311.02,4232.28 4311.02,4586.61
  Bottom Layer w6: CONN1.21 CONN1.21@2487.4,3828.74
  Bottom Layer w10: CONN1.21@2487.4,3828.74 v2(2487.4,3894.89)
B2: CONN1.22 U1.P15 | length 1979
  Top Layer w6: 3996.06,4606.3 3996.06,4665.35 U1.P15
  Top Layer w10: v2(2467.72,4131.11) 2854.33,4517.72 3937.01,4517.72 3996.06,4576.77 3996.06,4606.3
  Bottom Layer w12: CONN1.22 v2(2467.72,4131.11)
B3: CONN1.23 U1.G16 | length 2444.3
  Top Layer w6: 4291.34,4606.3 U1.G16
  Top Layer w10: v2(2448.03,3894.89) 2480.32,3927.17 2952.76,3927.17 3041.34,4015.75 4035.43,4015.75 4291.34,4271.65 4291.34,4606.3
  Bottom Layer w10: CONN1.23 v2(2448.03,3894.89)
B4: CONN1.24 U1.R16 | length 1939.6
  Top Layer w6: 3976.38,4606.3 U1.R16
  Top Layer w10: v2(2428.35,4140.95) 2844.49,4557.09 3927.17,4557.09 3976.38,4606.3
  Bottom Layer w12: CONN1.24 v2(2428.35,4140.95)
B5: CONN1.25 U1.G15 | length 2494.2
  Top Layer w6: 4271.65,4596.46 4271.65,4665.35 U1.G15
  Top Layer w10: v2(2408.66,3894.89) 2470.47,3956.69 2933.07,3956.69 3021.65,4045.28 4015.75,4045.28 4271.65,4301.18 4271.65,4596.46
  Bottom Layer w10: CONN1.25 v2(2408.66,3894.89)
CCFLBRITE: P2.6 U1.N14 | length 2983.5
  Top Layer w6: v1(4035.43,4704.72) U1.N14
  Mid-Layer 1 w6: P2.6 1860.24,4020.24 1860.24,4143.7 2312.99,4596.46 3927.17,4596.46 3996.06,4665.35 v1(4035.43,4704.72)
CCFLSLEEP: P2.5 U1.P14 | length 2899.6
  Top Layer w6: v1(3996.06,4704.72) U1.P14
  Mid-Layer 1 w6: P2.5 1605.43,3820 1820.87,4035.43 1820.87,4153.54 2293.31,4625.98 3877.95,4625.98 3956.69,4704.72 v1(3996.06,4704.72)
DCLK: CONN1.2 U1.J16 | length 1806.2
  Top Layer w6: 4212.6,4596.46 U1.J16
  Top Layer w10: v2(2861.42,4042.52) 2982.28,4163.39 3976.38,4163.39 4212.6,4399.61 4212.6,4596.46
  Bottom Layer w12: CONN1.2 v2(2861.42,4042.52)
DENA: CONN1.27 U1.H16 | length 2472.1
  Top Layer w6: 4251.97,4596.46 U1.H16
  Top Layer w10: v2(2369.29,3894.89) 2369.29,3934.26 2421.26,3986.22 2903.54,3986.22 3001.97,4084.65 4005.91,4084.65 4251.97,4330.71 4251.97,4596.46
  Bottom Layer w10: CONN1.27 v2(2369.29,3894.89)
FCCLK: R3.2 U1.T15 | length 772.1
  Top Layer w6: v1(3877.95,4685.04) U1.T15
  Top Layer w12: R3.2 3764.65,5320 3858.27,5226.38 v1(3858.27,4970.47)
  Mid-Layer 2 w12: v1(3858.27,4970.47) 3858.27,4704.72 v1(3877.95,4685.04)
FDIN: U1.M11 U3.40 | length 1570.7
  Top Layer w6: v1(4074.8,4862.2) U1.M11
  Top Layer w12: U3.40 2868.5,5251.57 v2(2933.07,5187.01)
  Mid-Layer 1 w6: 3937.01,4822.83 3976.38,4862.2 v1(4074.8,4862.2)
  Mid-Layer 1 w12: v2(2933.07,5187.01) 2982.28,5137.8 3523.62,5137.8 3838.58,4822.83 3937.01,4822.83
FDONE: R4.2 U1.R14 | length 622.4
  Top Layer w6: R4.2 3393.46,4741.89 v2(3430.12,4778.54) ; v1(3956.69,4744.09) U1.R14
  Mid-Layer 1 w6: v2(3430.12,4778.54) 3454.72,4778.54 3464.57,4768.7 3833.66,4768.7 3858.27,4744.09 v1(3956.69,4744.09)
FINIT: U1.N9 U3.39 | length 1418.5
  Top Layer w6: v1(4035.43,4940.94) U1.N9
  Top Layer w12: v2(2900,5279.13) U3.39
  Mid-Layer 1 w12: v2(2900,5279.13) 3011.81,5167.32 3809.06,5167.32 v1(4035.43,4940.94)
FPROG: R5.2 U1.B3 | length 1003.2
  Top Layer w6: R5.2 v2(3588.03,5285.43) ; v1(4468.5,5177.17) U1.B3
  Mid-Layer 1 w6: v2(3588.03,5285.43) 3809.06,5285.43 3897.64,5196.85 4446.09,5196.85 4447.45,5198.22 v1(4468.5,5177.17)
FTCK: R6.2 U1.C14 | length 717.8
  Top Layer w6: R6.2 3864.02,4740 v1(3887.8,4763.78) ; v1(4429.13,4704.72) U1.C14
  Mid-Layer 1 w6: v1(3887.8,4763.78) 4094.49,4763.78 4133.86,4724.41 4409.45,4724.41 v1(4429.13,4704.72)
FTDI: R8.2 U1.A2 | length 1327.5
  Top Layer w6: R8.2 3415.35,5278.11 v2(3415.35,5275.59) ; U1.A2 v1(4547.24,5216.54)
  Mid-Layer 1 w6: v2(3415.35,5275.59) 3513.78,5374.02 3799.21,5374.02 3937.01,5236.22 4527.56,5236.22 v1(4547.24,5216.54)
FTMS: R7.1 U1.C13 | length 948.4
  Top Layer w6: R7.1 3573.46,4764.41 v2(3602.36,4793.31) ; v1(4429.13,4744.09) U1.C13
  Mid-Layer 1 w6: v2(3602.36,4793.31) 3828.74,4793.31 3838.58,4803.15 4094.49,4803.15 4133.86,4763.78 4409.45,4763.78 v1(4429.13,4744.09)
G0: CONN1.13 U1.D15 | length 2553.2
  Top Layer w6: 4389.76,4586.61 4389.76,4665.35 U1.D15
  Top Layer w10: v2(2644.89,3752.75) 2644.89,3786.62 2657.48,3799.21 3051.18,3799.21 3110.24,3858.27 4114.17,3858.27 4389.76,4133.86 4389.76,4586.61
  Bottom Layer w10: v2(2644.89,3752.75) CONN1.13
G1: CONN1.14 U1.M15 | length 1934.8
  Top Layer w6: 4074.8,4606.3 4074.8,4665.35 U1.M15
  Top Layer w10: v2(2625.2,4091.74) 2893.7,4360.24 3956.69,4360.24 4074.8,4478.35 4074.8,4606.3
  Bottom Layer w12: CONN1.14 v2(2625.2,4091.74)
G2: CONN1.15 U1.E16 | length 2513.8
  Top Layer w6: 4370.08,4586.61 U1.E16
  Top Layer w10: v2(2605.51,3752.75) 2605.51,3796.46 2637.8,3828.74 3011.81,3828.74 3080.71,3897.64 4104.33,3897.64 4370.08,4163.39 4370.08,4586.61
  Bottom Layer w10: v2(2605.51,3752.75) CONN1.15
G3: CONN1.16 U1.N16 | length 1895.5
  Top Layer w6: 4055.12,4606.3 U1.N16
  Top Layer w10: v2(2585.83,4101.58) 2883.86,4399.61 3946.85,4399.61 4055.12,4507.87 4055.12,4606.3
  Bottom Layer w12: CONN1.16 v2(2585.83,4101.58)
G4: CONN1.17 U1.E15 | length 2567.8
  Top Layer w6: 4350.39,4576.77 4350.39,4665.35 U1.E15
  Top Layer w10: v2(2566.14,3752.75) 2566.14,3796.46 2627.95,3858.27 2992.13,3858.27 3070.87,3937.01 4084.65,3937.01 4350.39,4202.76 4350.39,4586.61
  Bottom Layer w10: v2(2566.14,3752.75) CONN1.17
G5: CONN1.18 U1.N15 | length 1956.9
  Top Layer w6: 4035.43,4606.3 4035.43,4665.35 U1.N15
  Top Layer w10: v2(2546.46,4111.42) 2874.02,4438.98 3946.85,4438.98 4035.43,4527.56 4035.43,4606.3
  Bottom Layer w12: CONN1.18 v2(2546.46,4111.42)
GND: C1.2 C2.2 C4.2 C5.2 C8.2 C9.2 C10.2 C14.2 C15.2 C18.2 C19.2 C20.1 C21.1 C22.2 C23.2 C24.2 C25.2 C26.2 C27.2 C28.2 C29.2 C30.1 C31.2 C32.2 C33.1 C34.1 C35.1 C36.2 C37.1 C38.1 C39.2 C40.1 C41.1 CONN1.1 CONN1.5 CONN1.12 CONN1.19 CONN1.26 DS1.2 DS2.2 J1.1 J1.4 J1.7 JP1.1 JP1.3 JP1.5 JP1.7 JP1.9 JP1.11 JP1.13 O1.2 P1.9 P1.10 P1.11 P1.12 P1.13 P1.14 P1.15 P1.16 P2.3 P2.4 P2.8 R11.1 U1.A1 U1.A16 U1.B2 U1.B9 U1.B15 U1.F6 U1.F11 U1.G7 U1.G8 U1.G9 U1.G10 U1.H2 U1.H7 U1.H8 U1.H9 U1.H10 U1.J7 U1.J8 U1.J9 U1.J10 U1.J15 U1.K7 U1.K8 U1.K9 U1.K10 U1.L6 U1.L11 U1.R2 U1.R8 U1.R15 U1.T1 U1.T16 U2.3 U3.4 U3.17 U3.25 U4.3 U5.3 U6.1 U6.12 U6.13 U6.14 U6.20 U6.22 | length 7634.8
  Top Layer w6: v2(2687.01,5531.5) 2706.69,5551.18 P1.10@2706.69,5629.92 ; v1(3917.32,4625.98) U1.T16 ; U1.T1 v1(3937.01,5275.59) ; v1(3956.69,4665.35) U1.R15 ; v1(3956.69,4940.94) U1.R8 ; U1.R2 v1(3996.06,5177.17) ; v1(4114.17,4822.83) U1.L11 ; v1(4114.17,5059.06) U1.L6 ; v1(4153.54,4862.2) U1.K10 ; v1(4153.54,4901.57) U1.K9 ; v1(4153.54,4980.31) U1.K8 ; v1(4153.54,5019.69) U1.K7 ; v1(4192.91,4665.35) U1.J15 ; v1(4192.91,4862.2) U1.J10 ; v1(4192.91,4901.57) U1.J9 ; v1(4192.91,4980.31) U1.J8 ; v1(4192.91,5019.69) U1.J7 ; U1.H10 v1(4271.65,4862.2) ; U1.H9 v1(4271.65,4901.57) ; U1.H8 v1(4271.65,4980.31) ; U1.H7 v1(4271.65,5019.69) ; U1.H2 v1(4271.65,5177.17) ; U1.G10 v1(4311.02,4862.2) ; U1.G9 v1(4311.02,4901.57) ; U1.G8 v1(4311.02,4980.31) ; U1.G7 v1(4311.02,5019.69) ; U1.F11 v1(4350.39,4822.83) ; U1.F6 v1(4350.39,5059.06) ; v1(4468.5,4665.35) U1.B15 ; v1(4468.5,4940.94) U1.B9 ; U1.B2 v1(4507.87,5216.54) ; U1.A16 v1(4547.24,4625.98) ; U1.A1 v1(4547.24,5255.91)
  Top Layer w12: U3.4 v2(2722.99,5222.99) ; v2(2900,4865.75) U3.17 ; v2(3067.48,5065.51) U3.25 ; O1.2 v2(3680.79,5118.43) ; DS2.2 v2(4846.62,5202.6) ; v2(4820.08,4933.86) U6.14 ; v2(4879.25,4881.94) 4879.25,4980.34 4883.86,4984.94 4897.64,4984.94 4904.84,4977.74 U6.12 ; v2(4980.31,4610.04) U6.20@4980.31,4665.14 ; v2(5012.8,4608.07) 5031.5,4626.77 U6.22@5031.5,4663.18 ; v2(5053.19,5060) R11.1 ; DS1.2 v2(5186.18,5202.6) ; v2(5187.01,4872.05) U6.1@5187.01,4931.1 ; J1.4@5511.81,5068.9 v2(5600.39,5068.9) ; J1.1 v2(5589.29,4920) ; J1.7@5521.65,5216.54 v2(5600.39,5216.54)
  Top Layer w16: C19.2@3341.54,5807.09 v3(3341.54,5895.67) ; C19.2@3341.54,5812.01 v3(3425.2,5812.01) ; U2.3@3620,5580 U2.3@3620,5765.67 ; C21.1 v3(3850.75,5460) ; v3(3938.27,5670.55) C32.2 ; C18.2@4069.88,5836.61 v3(4168.31,5836.61) ; U4.3@4300,5440 4300,5520.47 4301.18,5521.65 U4.3@4301.18,5634.84 ; v3@4438.98,5551.18 v3(4443.9,5556.1) ; v3(4600,5820.47) C31.2 v3(4687.76,5730.55) ; C34.1@4655.51,5403.54 v3(4729.33,5403.54) ; C36.2@4822.83,5728.35 v3(4822.83,5821.85) ; C36.2@4822.83,5733.27 v3(4906.5,5733.27) ; v3(4900,5213.19) C38.1 ; U5.3@5118.11,5580 5118.11,5659.45 5123.03,5664.37 U5.3@5123.03,5756.97 ; C39.2 v3(5336.65,5440) ; v3(5255.91,5354.33) C39.2@5255.91,5437.99
  Top Layer w20: JP1.5@2150.59,5157.48 JP1.5@2204.72,5157.48 ; v3(2155.51,4783.46) JP1.13@2155.51,4842.52 ; JP1.9@2155.51,5000 2204.72,5000 v3(2244.09,5039.37) 2244.09,5044.29 2208.39,5080 JP1.7 ; JP1.3@2155.51,5236.22 2204.72,5236.22 v3(2244.09,5196.85) 2205.98,5158.74 JP1.5 ; JP1.11 2205.98,4922.52 v3(2239.17,4955.71) ; JP1.1 2171.54,5316.22 v3(2224.41,5369.09) ; v3(2410,5533.07) P1.16 ; P1.15 v3(2410,5906.93) ; v3(2510,5533.07) P1.14 ; P1.13 v3(2510,5906.93) ; v3(2610,5533.07) P1.12 ; P1.11 v3(2610,5906.93) ; P1.9 v3(2710,5906.93)
  Top Layer w30: v3(3540,5870) U2.3@3630,5780 ; U2.3@3620,5780 v3(3700,5860) ; v3(4216.85,5720) 4300,5636.85 v3(4390,5726.85) ; v3(5040,5870) U5.3@5130,5780 ; v3(5050,5690) U5.3@5120,5760 ; U5.3@5110,5780 v3(5200,5870) ; U5.3@5120,5776.85 U5.3@5120,5760 ; v3(5190,5690) U5.3@5120,5760
  Bottom Layer w10: CONN1.26 v2(2388.98,4052.37) ; v2(2526.77,3752.75) CONN1.19 ; CONN1.12 v2(2664.57,4042.52) ; v2(2802.37,3762.6) CONN1.5 ; v2(2881.11,3762.6) CONN1.1
  Bottom Layer w12: v2(2722.99,5222.99) 2743.05,5202.93 C22.2 ; v2(3523.62,5098.43) 3540,5082.05 C27.2 ; v1(3956.69,4940.94) 3956.69,4909.39 C8.2 ; C15.2 4025.59,5068.9 v1(4035.43,5059.06) ; v1(3996.06,4940.94) 4025.59,4911.42 C5.2 ; v1(4074.8,4704.72) 4075,4704.53 C9.2 ; C1.2 4129.92,5122.05 v1(4153.54,5098.43) ; C29.2 4183.48,4674.79 v1(4192.91,4665.35) 4222.44,4694.88 C26.2 ; v2(4140,5328.5) C33.1 ; C23.2 4175.86,4940 4192.91,4922.95 v1(4192.91,4901.57) ; v1@4198.82,4868.11 C24.2 ; v1(4271.65,5177.17) 4285.09,5177.17 4305.21,5157.04 C28.2 ; C25.2 4303.21,4909.39 v1(4311.02,4901.57) ; v1(4389.76,5019.69) 4399.61,5019.69 4419.29,5039.37 C2.2@4429.13,5039.37 ; C14.2@4458.66,5265.75 v1(4507.87,5265.75) ; v1(4468.5,4940.94) 4486.16,4958.6 C10.2 ; v1(4468.5,4980.31) 4488.19,5000 C4.2 ; v2@4880.16,4882.85 C40.1@4880.16,4921.5 ; v2(5012.8,4608.07) C41.1@5012.8,4648.56
  Bottom Layer w16: C20.1 3581.72,5624.04 v3@3612.2,5654.53 ; C30.1@3801.72,5580 v3(3858.98,5580) ; v3(4443.9,5556.1) C35.1@4502.95,5556.1 ; C37.1@4896.65,5521.65 4896.65,5565.94 v3(4916.34,5585.63)
  other v3: 4301.18,5531.5 3620,5652.48
HD: CONN1.3 U1.B16 | length 2612
  Top Layer w6: 4468.5,4586.61 4468.5,4625.98 U1.B16
  Top Layer w10: v2(2841.74,3644.49) 2844.49,3641.73 3159.45,3641.73 3218.5,3700.79 4173.23,3700.79 4468.5,3996.06 4468.5,4586.61
  Bottom Layer w10: v2(2841.74,3644.49) CONN1.3
IORX+: J1.6 U1.A8 | length 1079.9
  Top Layer w6: U1.A8 4534.33,4960.63 4535.28,4959.69 4546.7,4971.11
  Top Layer w11: 4546.7,4971.11 4704.59,5129 5424.28,5129 5465.28,5170 J1.6
IORX-: J1.5 U1.B8 | length 1113.9
  Top Layer w6: U1.B8 4507.63,4941.19 4542.32,4941.19 ; J1.5@5501.97,5120 J1.5
  Top Layer w11: 4542.32,4941.19 4557.31,4941.19 4689.95,5073.83 ; 4689.96,5073.82 4720.14,5104 5441.68,5104 5457.68,5120 J1.5@5501.97,5120
IOTX+: J1.2 R9.2 R10.2 U6.5 | length 606.7
  Top Layer w6: U6.5 U6.5@5083.98,4940.94
  Top Layer w11: U6.5@5083.98,4940.94 5083.98,4975.7 5108.27,5000 5206.69,5000 5231.3,4975.39 R10.2@5260,4975.39 ; R10.2 5283.62,4990.16 5433.07,4990.16 5457.68,4965.55 J1.2@5526.57,4965.55
  Top Layer w12: R10.2 5313.07,4913.46 R9.2
IOTX-: J1.3 R10.1 R11.2 U6.6 | length 651.8
  Top Layer w6: U6.6@5059.3,4921.5 U6.6@5059.3,4933.86
  Top Layer w11: U6.6@5059.06,4931.1 5059.06,4990.16 5093.5,5024.61 5467.83,5024.61 5472.44,5020 J1.3
  Top Layer w12: R11.2@5167.32,5059.06 5234.41,5059.06 R10.1
NetC30_2: C30.2 U2.5 | length 119.8
  Top Layer w16: U2.5 3720,5566.42 v3(3754.92,5531.5)
  Bottom Layer w16: C30.2@3734.79,5580 3734.79,5551.63 v3(3754.92,5531.5)
NetC35_2: C35.2 U4.5 | length 115.5
  Top Layer w16: U4.5 4426.22,5440 v3(4448.82,5462.6)
  Bottom Layer w16: v3(4448.82,5462.6) 4458.66,5462.6 4478.35,5482.28 C35.2@4498.03,5482.28
NetDS1_1: DS1.1 R1.2 | length 120.9
  Top Layer w12: R1.2@5002.13,5275.59 DS1.1@5123.03,5275.59
NetDS2_1: DS2.1 R2.2 | length 124.8
  Top Layer w6: DS2.1@4780,5275.59 DS2.1@4783.46,5275.59
  Top Layer w12: R2.2@4662.13,5275.59 DS2.1@4783.46,5275.59
NetP1_7: P1.7 U3.8 | length 926.2
  Top Layer w12: U3.8 2619.53,5097.01 2571.04,5145.49 2571.04,5351.55 2760.83,5541.34 2760.83,5780.83 P1.7@2829.72,5849.72
NetR1_1: R1.1 U1.A10 | length 587.1
  Top Layer w6: U1.A10 4655.51,4881.89 v2(4734.25,4960.63) ; v2(4940.94,5167.32) 4980.16,5206.54
  Mid-Layer 1 w6: v2(4734.25,4960.63) v2(4940.94,5167.32)
NetR2_1: R2.1 U1.B10 | length 436.2
  Top Layer w6: U1.B10 4507.87,4901.57 4576.77,4901.57 v2(4645.67,4970.47) ; v2(4660,5142.28) R2.1
  Mid-Layer 1 w6: v2(4645.67,4970.47) 4660,4984.8 v2(4660,5142.28)
NetR3_1: R3.1 U3.38 | length 874.1
  Top Layer w12: U3.38 2931.5,5451.18 2977.36,5497.05 3479.33,5497.05 3542.84,5433.54 R3.1@3656.38,5320
NetR4_1: R4.1 U3.37 | length 825.4
  Top Layer w12: U3.37 2962.99,5098.03 3100.39,4960.63 3100.39,4931.1 3291.5,4740 R4.1
NetR5_1: R5.1 U3.36 | length 624.8
  Top Layer w6: R5.1 R5.1@3486.54,5322.52
  Top Layer w12: U3.36 2994.49,5445.28 3026.57,5477.36 3331.69,5477.36 3375.98,5433.07 ; 3374.72,5431.81 R5.1
NetR8_1: R8.1 U3.24 | length 397.8
  Top Layer w12: U3.24 3203.31,5034.02 3306.54,5137.24 R8.1
R0: CONN1.6 U1.K15 | length 1861.9
  Top Layer w6: 4153.54,4596.46 4153.54,4665.35 U1.K15
  Top Layer w10: v2(2782.68,4062.21) 2962.6,4242.13 3956.69,4242.13 4153.54,4438.98 4153.54,4596.46
  Bottom Layer w12: CONN1.6 v2(2782.68,4062.21)
R1: CONN1.7 U1.C16 | length 2601.5
  Top Layer w6: 4448.82,4586.61 U1.C16
  Top Layer w10: v2(2763,3674.01) 3132.67,3674.01 3198.82,3740.16 4163.39,3740.16 4448.82,4025.59 4448.82,4586.61
  Bottom Layer w10: v2(2763,3674.01) CONN1.7
R2: CONN1.8 U1.L15 | length 1867.6
  Top Layer w6: 4114.17,4596.46 4114.17,4665.35 U1.L15
  Top Layer w10: v2(2743.31,4072.05) 2952.76,4281.5 3956.69,4281.5 4114.17,4438.98 4114.17,4596.46
  Bottom Layer w12: CONN1.8 v2(2743.31,4072.05)
R3: CONN1.9 U1.C15 | length 2609.7
  Top Layer w6: 4429.13,4586.61 4429.13,4665.35 U1.C15
  Top Layer w10: v2(2723.63,3703.54) 3103.15,3703.54 3179.13,3779.53 4153.54,3779.53 4429.13,4055.12 4429.13,4586.61
  Bottom Layer w10: v2(2723.63,3703.54) CONN1.9
R4: CONN1.10 U1.M16 | length 1834
  Top Layer w6: 4094.49,4606.3 U1.M16
  Top Layer w10: v2(2703.94,4081.89) 2942.91,4320.87 3956.69,4320.87 4094.49,4458.66 4094.49,4606.3
  Bottom Layer w12: CONN1.10 v2(2703.94,4081.89)
R5: CONN1.11 U1.D16 | length 2499.6
  Top Layer w6: 4409.45,4586.61 U1.D16
  Top Layer w10: v2(2684.26,3752.75) 2696.85,3740.16 3061.02,3740.16 3139.76,3818.9 4133.86,3818.9 4409.45,4094.49 4409.45,4586.61
  Bottom Layer w10: v2(2684.26,3752.75) CONN1.11
REFCLK: U1.E10 U6.3 | length 870.9
  Top Layer w6: U1.E10 v1(4389.76,4862.2) ; v2(5127.95,4872.05) 5135.16,4879.25 U6.3
  Mid-Layer 2 w6: v1(4389.76,4862.2) 4409.45,4881.89 4448.82,4881.89 4468.5,4901.57 5118.11,4901.57 5127.95,4891.73 v2(5127.95,4872.05)
REV: CONN1.31 U1.H15 | length 2544.1
  Top Layer w6: 4232.28,4596.46 4232.28,4665.35 U1.H15
  Top Layer w10: 2401.57,4015.75 2883.86,4015.75 2992.13,4124.02 3996.06,4124.02 4232.28,4360.24 4232.28,4596.46
  Top Layer w12: v2(2290.55,3904.73) 2401.57,4015.75
  Bottom Layer w10: CONN1.31 v2(2290.55,3904.73)
RXCLK: U1.D12 U6.9 | length 661.8
  Top Layer w6: U1.D12 v1(4429.13,4822.83) ; v2(4950.79,4842.52) 4981.61,4873.35 U6.9
  Mid-Layer 1 w6: v1(4429.13,4822.83) 4448.82,4842.52 v2(4950.79,4842.52)
RXDAT0: U1.C10 U6.28 | length 889.2
  Top Layer w6: U1.C10 v1(4468.5,4862.2) ; U6.28 v2(5186.34,4744.76)
  Mid-Layer 1 w6: v1(4468.5,4862.2) 4488.19,4881.89 4685.04,4881.89 4704.72,4862.2 5068.9,4862.2 v2(5186.34,4744.76)
RXDAT1: U1.C11 U6.27 | length 828.7
  Top Layer w6: U1.C11 v1(4468.5,4822.83) ; v2(5059.06,4822.83) 5078.74,4822.83 5160.75,4740.83 U6.27
  Mid-Layer 1 w6: v1(4468.5,4822.83) v2(5059.06,4822.83)
RXDAT2: U1.C12 U6.26 | length 784.8
  Top Layer w6: U1.C12 v1(4468.5,4783.46) ; v2(5098.67,4773.85) 5135.16,4737.37 U6.26
  Mid-Layer 1 w6: v1(4468.5,4783.46) 4478.11,4773.85 v2(5098.67,4773.85)
RXDAT3: U1.B11 U6.25 | length 728.1
  Top Layer w6: U1.B11 4507.64,4823.07 5010.09,4823.07 5109.57,4723.59 U6.25
RXDAT4: U1.A12 U6.24 | length 630.6
  Top Layer w6: U1.A12@4535.28,4802.2 4991.58,4802.2 5083.98,4709.81 U6.24
RXDAT5: U1.B12 U6.19 | length 555.9
  Top Layer w6: U1.B12 4507.64,4783.7 4891.97,4783.7 4956.02,4719.65 U6.19
RXDAT6: U1.A13 U6.18 | length 464.2
  Top Layer w6: U1.A13@4535.28,4762.83 4883.31,4762.83 4930.43,4715.71 U6.18
RXDAT7: U1.B13 U6.17 | length 502.6
  Top Layer w6: U1.B13 4507.87,4744.09 4527.33,4744.09 ; 4514.41,4744.33 4882.13,4744.33 4904.84,4721.61 U6.17
RXDAT8: U1.A14 U6.16 | length 392.1
  Top Layer w6: U1.A14@4535.28,4723.46 4863.62,4723.46 4879.25,4707.83 U6.16
RXDAT9: U1.B14 U6.15 | length 389.6
  Top Layer w6: U1.B14 4507.87,4704.72 4566.93,4704.72 4605.51,4666.14 U6.15
RXLOCK: U1.D10 U6.10 | length 652.8
  Top Layer w6: U1.D10 v1(4429.13,4901.57) ; v2(4940.94,5000) 4956.02,4984.92 U6.10
  Mid-Layer 1 w6: v1(4429.13,4901.57) 4724.41,4901.57 4822.83,5000 v2(4940.94,5000)
SYSCLK: O1.3 U1.T9 U3.1 | length 1460.1
  Top Layer w6: 3907.48,4921.26 U1.T9
  Top Layer w12: U3.1 v2(2733.7,5317.48) ; v2(3385.83,5088.58) 3415.67,5118.43 O1.3 3553.7,5019.69 3700.79,5019.69 3799.21,4921.26 3907.48,4921.26
  Mid-Layer 1 w12: v2(2733.7,5317.48) 2962.6,5088.58 v2(3385.83,5088.58)
TCK: JP1.6 R6.1 U3.11 | length 1597
  Top Layer w12: JP1.6@2278.74,5162.52 2367.01,5162.52 2527.01,5002.52 2723.86,5002.52 v2(2736.22,4990.16) ; v2@3645.83,4740 R6.1
  Mid-Layer 1 w12: v2(2736.22,4990.16) 3090.55,4990.16 3336.61,4744.09 v2(3641.73,4744.09)
TDI: JP1.10 U3.9 | length 511
  Top Layer w6: JP1.10@2323.66,5005.04 v2(2406.61,5005.04) ; U3.9@2657.48,5068.9 2660.87,5065.51 v2(2732.83,5065.51)
  Mid-Layer 1 w12: v2(2406.61,5005.04) 2455.83,5005.04 2516.3,5065.51 v2(2732.83,5065.51)
TDO: JP1.8 U1.A15 | length 2511.8
  Top Layer w6: JP1.8@2367.01,5083.78 2805.12,4645.67 v2(3661.42,4645.67) ; v1(4507.87,4665.35) U1.A15
  Top Layer w12: JP1.8@2278.74,5083.78 JP1.8@2367.01,5083.78
  Mid-Layer 1 w6: v2(3661.42,4645.67) 3779.53,4645.67 3858.27,4724.41 3976.38,4724.41 3996.06,4744.09 4074.8,4744.09 4114.17,4704.72 4379.92,4704.72 4399.61,4685.04 4488.19,4685.04 v1(4507.87,4665.35)
TEST: CONN1.30
TMS: JP1.4 R7.2 U3.10 | length 1431.1
  Top Layer w12: JP1.4@2278.74,5241.26 2386.69,5241.26 2593.94,5034.02 2741.58,5034.02 v2(2746.06,5029.53) ; v2(3336.61,4803.15) 3444.88,4803.15 R7.2@3503.94,4744.09
  Mid-Layer 1 w12: v2(2746.06,5029.53) 3110.24,5029.53 v2(3336.61,4803.15)
VCC: C19.1 C20.2 C22.1 C23.1 C24.1 C25.1 C26.1 C27.1 C28.1 C29.1 C32.1 C33.2 C36.1 C37.2 C40.2 C41.2 CONN1.28 CONN1.29 JP1.2 O1.4 P1.1 P1.3 P1.5 R9.1 U1.E9 U1.F9 U1.F10 U1.G6 U1.G11 U1.H5 U1.H6 U1.H11 U1.H12 U1.J5 U1.J6 U1.J11 U1.J12 U1.K6 U1.K11 U1.L7 U1.L8 U1.L9 U1.L10 U1.M8 U1.M9 U1.P3 U1.P4 U1.T2 U2.1 U2.2 U3.7 U3.26 U3.35 U4.1 U4.2 U5.1 U5.2 U6.2 U6.4 U6.7 U6.8 U6.11 U6.21 U6.23 | length 3721.7
  Top Layer w6: U3.26 3187.56,5097.01 v2@3198.82,5108.27 ; O1.4 3510.94,4918.43 v2(3540,4947.48) ; v1(3900,5170) 3926.85,5196.85 U1.T2 ; v1@4000,5140 U1.P4@4015.75,5124.25 ; U1.P4 U1.P3 ; v1(4074.8,4901.57) U1.M9 ; v1(4074.8,4980.31) U1.M8 ; v1(4114.17,4862.2) U1.L10 ; v1(4114.17,4901.57) U1.L9 ; v1(4114.17,4980.31) U1.L8 ; v1(4114.17,5019.69) U1.L7 ; v1(4153.54,4822.83) U1.K11 ; v1(4153.54,5059.06) U1.K6 ; v1(4192.91,4783.46) U1.J12 ; v1(4192.91,4822.83) U1.J11 ; v1(4192.91,5059.06) U1.J6 ; v1(4192.91,5098.43) U1.J5 ; U1.H12 v1(4271.65,4783.46) ; U1.H11 v1(4271.65,4822.83) ; U1.H6 v1(4271.65,5059.06) ; U1.H5 v1(4271.65,5098.43) ; U1.G11 v1(4311.02,4822.83) ; U1.G6 v1(4311.02,5059.06) ; U1.F10 v1(4350.39,4862.2) ; U1.F9 v1(4350.39,4901.57) ; U1.E9 v1(4389.76,4901.57)
  Top Layer w10: v2(2329.92,3762.6) 2342.52,3750
  Top Layer w12: U3.7@2667.32,5127.95 v2(2726.38,5127.95) ; v2(3025.98,5330.32) U3.35 ; U3.26 3177.72,5097.01 ; v2(3454.72,4872.05) O1.4@3454.72,4911.42 ; v2(4930.43,4881.31) U6.11 ; v2(4990.16,5000) 5007.2,4982.95 U6.8 ; v2(4997.05,4739.93) 5005.91,4731.07 U6.21@5005.91,4666.13 ; U6.8@5004.92,4936.02 5004.92,4980.31 ; U6.7 v2(5032.8,4991.81) ; v2(5058.39,4614.29) U6.23 ; v2(5097.49,4872.05) 5109.57,4884.13 U6.4 ; v2(5160.75,4878.62) U6.2 ; v2(5320,4783.35) R9.1
  Top Layer w16: C19.1@3341.54,5629.92 v3(3425.2,5629.92) ; U2.1 v3(3520,5648.31) ; v3(3570,5509.72) U2.2 ; v3(3944.17,5489.45) C32.1 ; C32.1@4025.59,5492.13 4138.78,5492.13 v3(4140,5490.91) ; v3@4202.76,5374.02 U4.1@4202.76,5442.91 ; v3(4202.76,5378.94) 4222.44,5378.94 4251.97,5408.46 U4.2@4251.97,5437.99 ; v3(4729.33,5546.26) C36.1@4827.76,5546.26 ; v3(4822.83,5457.68) C36.1@4822.83,5546.26 ; v3(5019.69,5521.65) 5059.06,5521.65 5070,5532.6 U5.2 ; v3@5020,5521.97 U5.1 ; U5.1@5024.61,5580 U5.1@5024.61,5580.71
  Top Layer w20: JP1.2 v3(2423.19,5316.22) ; P1.5 v3(2910,5906.93) ; P1.3 v3(3010,5906.93) ; P1.1 v3(3110,5906.93)
  Bottom Layer w10: v2(2329.92,3762.6) CONN1.29 ; CONN1.28 v2(2349.61,4042.52)
  Bottom Layer w12: v2(2726.38,5127.95) 2750.17,5151.75 C22.1 ; v2(3540,4947.48) C27.1 ; C23.1 4106.16,4909.59 v1(4114.17,4901.57) ; C29.1 4140,4766.73 4156.74,4783.46 v1(4192.91,4783.46) 4222.44,4753.94 C26.1 ; C24.1 4265.75,4816.93 v1(4271.65,4822.83) ; C28.1 4238.28,5124.58 4264.44,5098.43 v1(4271.65,5098.43) ; v1(4350.39,4901.57) 4354.39,4905.57 C25.1 ; v2@4931.34,4882.22 C40.2@4931.34,4921.5 ; v2(4997.05,4739.93) 5009.84,4727.13 C41.2
  Bottom Layer w16: v3(3468.78,5580) C20.2 ; C33.2 v3(4140,5490.91) ; C37.2@4970.47,5521.65 v3@5029.53,5521.65
  other v1: 3996.06,5137.8
  other v2: 3198.82,5114.27
VD: CONN1.4 U1.K16 | length 1806.2
  Top Layer w6: 4173.23,4596.46 U1.K16
  Top Layer w10: v2(2822.05,4052.37) 2972.44,4202.76 3966.54,4202.76 4173.23,4409.45 4173.23,4596.46
  Bottom Layer w12: CONN1.4 v2(2822.05,4052.37)
pads on no net: CONN1.0 J1.0 JP1.0 JP1.12 JP1.14 O1.1 P2.7 U1.A3 U1.A4 U1.A5 U1.A7 U1.A9 U1.B1 U1.B4 U1.B5 U1.B6 U1.B7 U1.C1 U1.C2 U1.C3 U1.C4 U1.C5 U1.C6 U1.C7 U1.C8 U1.C9 U1.D1 U1.D2 U1.D3 U1.D5 U1.D6 U1.D7 U1.D8 U1.D9 U1.D11 U1.D14 U1.E1 U1.E2 U1.E3 U1.E4 U1.E6 U1.E7 U1.E11 U1.E13 U1.E14 U1.F2 U1.F3 U1.F4 U1.F5 U1.F12 U1.F13 U1.F14 U1.G1 U1.G2 U1.G3 U1.G4 U1.G5 U1.G12 U1.G13 U1.G14 U1.H1 U1.H3 U1.H4 U1.H13 U1.H14 U1.J1 U1.J2 U1.J3 U1.J4 U1.J13 U1.J14 U1.K1 U1.K2 U1.K3 U1.K4 U1.K5 U1.K12 U1.K13 U1.K14 U1.L2 U1.L3 U1.L4 U1.L5 U1.L12 U1.L13 U1.L14 U1.M1 U1.M2 U1.M3 U1.M4 U1.M6 U1.M7 U1.M10 U1.M13 U1.M14 U1.N1 U1.N2 U1.N3 U1.N5 U1.N6 U1.N7 U1.N8 U1.N10 U1.N11 U1.N12 U1.P1 U1.P2 U1.P5 U1.P6 U1.P7 U1.P8 U1.P9 U1.P10 U1.P11 U1.P12 U1.P13 U1.R1 U1.R3 U1.R4 U1.R5 U1.R6 U1.R7 U1.R9 U1.R10 U1.R11 U1.R12 U1.R13 U1.T3 U1.T4 U1.T5 U1.T7 U1.T8 U1.T10 U1.T12 U1.T13 U1.T14 U3.2 U3.3 U3.5 U3.6 U3.12 U3.13 U3.14 U3.16 U3.18 U3.19 U3.20 U3.21 U3.22 U3.23 U3.27 U3.28 U3.29 U3.30 U3.31 U3.32 U3.33 U3.34 U3.41 U3.42 U3.43 U3.44

## Polygon pours and split planes (outlines as drawn)
VCC on Top Layer (solid): 3858.98,5537.1 3858.98,5344.49 5103.35,5344.49 5103.35,5590 3858.98,5590
+12VCC on Top Layer (solid): 1456.69,3425.2 3218.5,3425.2 3218.5,6023.62 1456.69,6023.62
GND on Top Layer (solid): 5118.11,5314.96 5433.07,5314.96 5433.07,5939.96 3213.58,5939.96 3213.58,5693.9 3794.29,5693.9 3880,5610 5070,5610 5068.9,5314.96
+1.2VCC on Mid-Layer 2 (solid): 3779.53,5669.29 3779.53,4488.19 4685.04,4488.19 4685.04,5314.96 5433.07,5314.96 5433.07,5944.88 3779.53,5944.88
+2.5VCC on Bottom Layer (solid): 3868.11,5944.88 3868.11,4488.19 4685.04,4488.19 4685.04,5944.88
+1.8VCC on Bottom Layer (solid): 2559.06,6023.62 2559.06,4724.41 3848.43,4724.41 3848.43,5364.17 3946.85,5364.17 3946.85,6023.62
GND on Internal Plane 1 (split plane): 1420.02,2520.01 7979.98,2520.01 7979.98,6779.98 1420.02,6779.98
VCC on Internal Plane 2 (split plane): 1420.02,2520.01 7979.98,2520.01 7979.98,6779.98 1420.02,6779.98

## Keep-outs
Keep-Out Layer:
  lines w10: 1450,2550 7950,2550 7950,6750 1450,6750 1450,2550

## Other copper
Top Layer:
  text "Layer 1" at 8270,3660 h60
Mid-Layer 1:
  text "Layer 3" at 8260,3420 h60
Mid-Layer 2:
  text "Layer 4" at 8260,3290 h60
Bottom Layer:
  text "Layer 6" at 8260,3000 h60
Internal Plane 1 (plane layer: these items are gaps in the copper):
  text "Layer 2" at 8260,3540 h60
Internal Plane 2 (plane layer: these items are gaps in the copper):
  text "Layer 5" at 8260,3150 h60

## Silkscreen, mask and mechanical layers (free items; w line width, h text height)
Top Overlay:
  drawing of 336 lines, arcs and shapes, not listed
  text "SYSTEM" at 2800,5950 h60
  text "JTAG" at 2420,5010 h60 r270
  text "+12VCC" at 1640,4200 h40
  text "CCFL Power" at 1900,4180 h60 r270
  text "+12VCC" at 1640,4100 h40
  text "GND" at 1640,4000 h40
  text "GND" at 1640,3900 h40
  text "SLEEP" at 1640,3800 h40
  text "BRITE" at 1640,3700 h40
  text "SET0" at 1640,3600 h40
  text "SET1" at 1640,3500 h40
  text "version 1.0" at 3005.49,3221.01 h30
  text "Display" at 3435.33,3102.58 h160
  text "2006" at 4655.8,2964.79 h80
  text "Copyright Eric Jonas" at 3425.49,2954.95 h60
  text "Soma" at 1831,2866.36 h400
  text "The Wilson Lab, PILM" at 3425.49,2846.68 h60
  text "soma.mit.edu" at 4665.65,2846.68 h80
Mechanical 4:
  lines w8: 1500,2781.89 7900,2781.89 ; 1500,6400 7900,6400 ; 1700,2500 1700,6800 ; 7703.94,2500 7703.94,6800
Mechanical 5:
  the board outline again, w8
Drill Drawing:
  text ".LEGEND" at 6200,3200 h60
  text "Drill Drawing." at 6200,3100 h60

## Dimensions
1450,2550 to 7950,2550 on Mechanical 1
1450,2550 to 1450,6750 on Mechanical 1